# Altium PCB Main.PcbDoc
Units mm, origin at the board's own origin, x right, y up, seen from the top; angles counter-clockwise.
Board outline 64.5 x 68 mm, 4 copper layers (Top Layer, Ground Layer, Power Layer, Bottom Layer), stack 1.591 mm thick; 74 components, 72 nets, 320 pads, 80 vias.
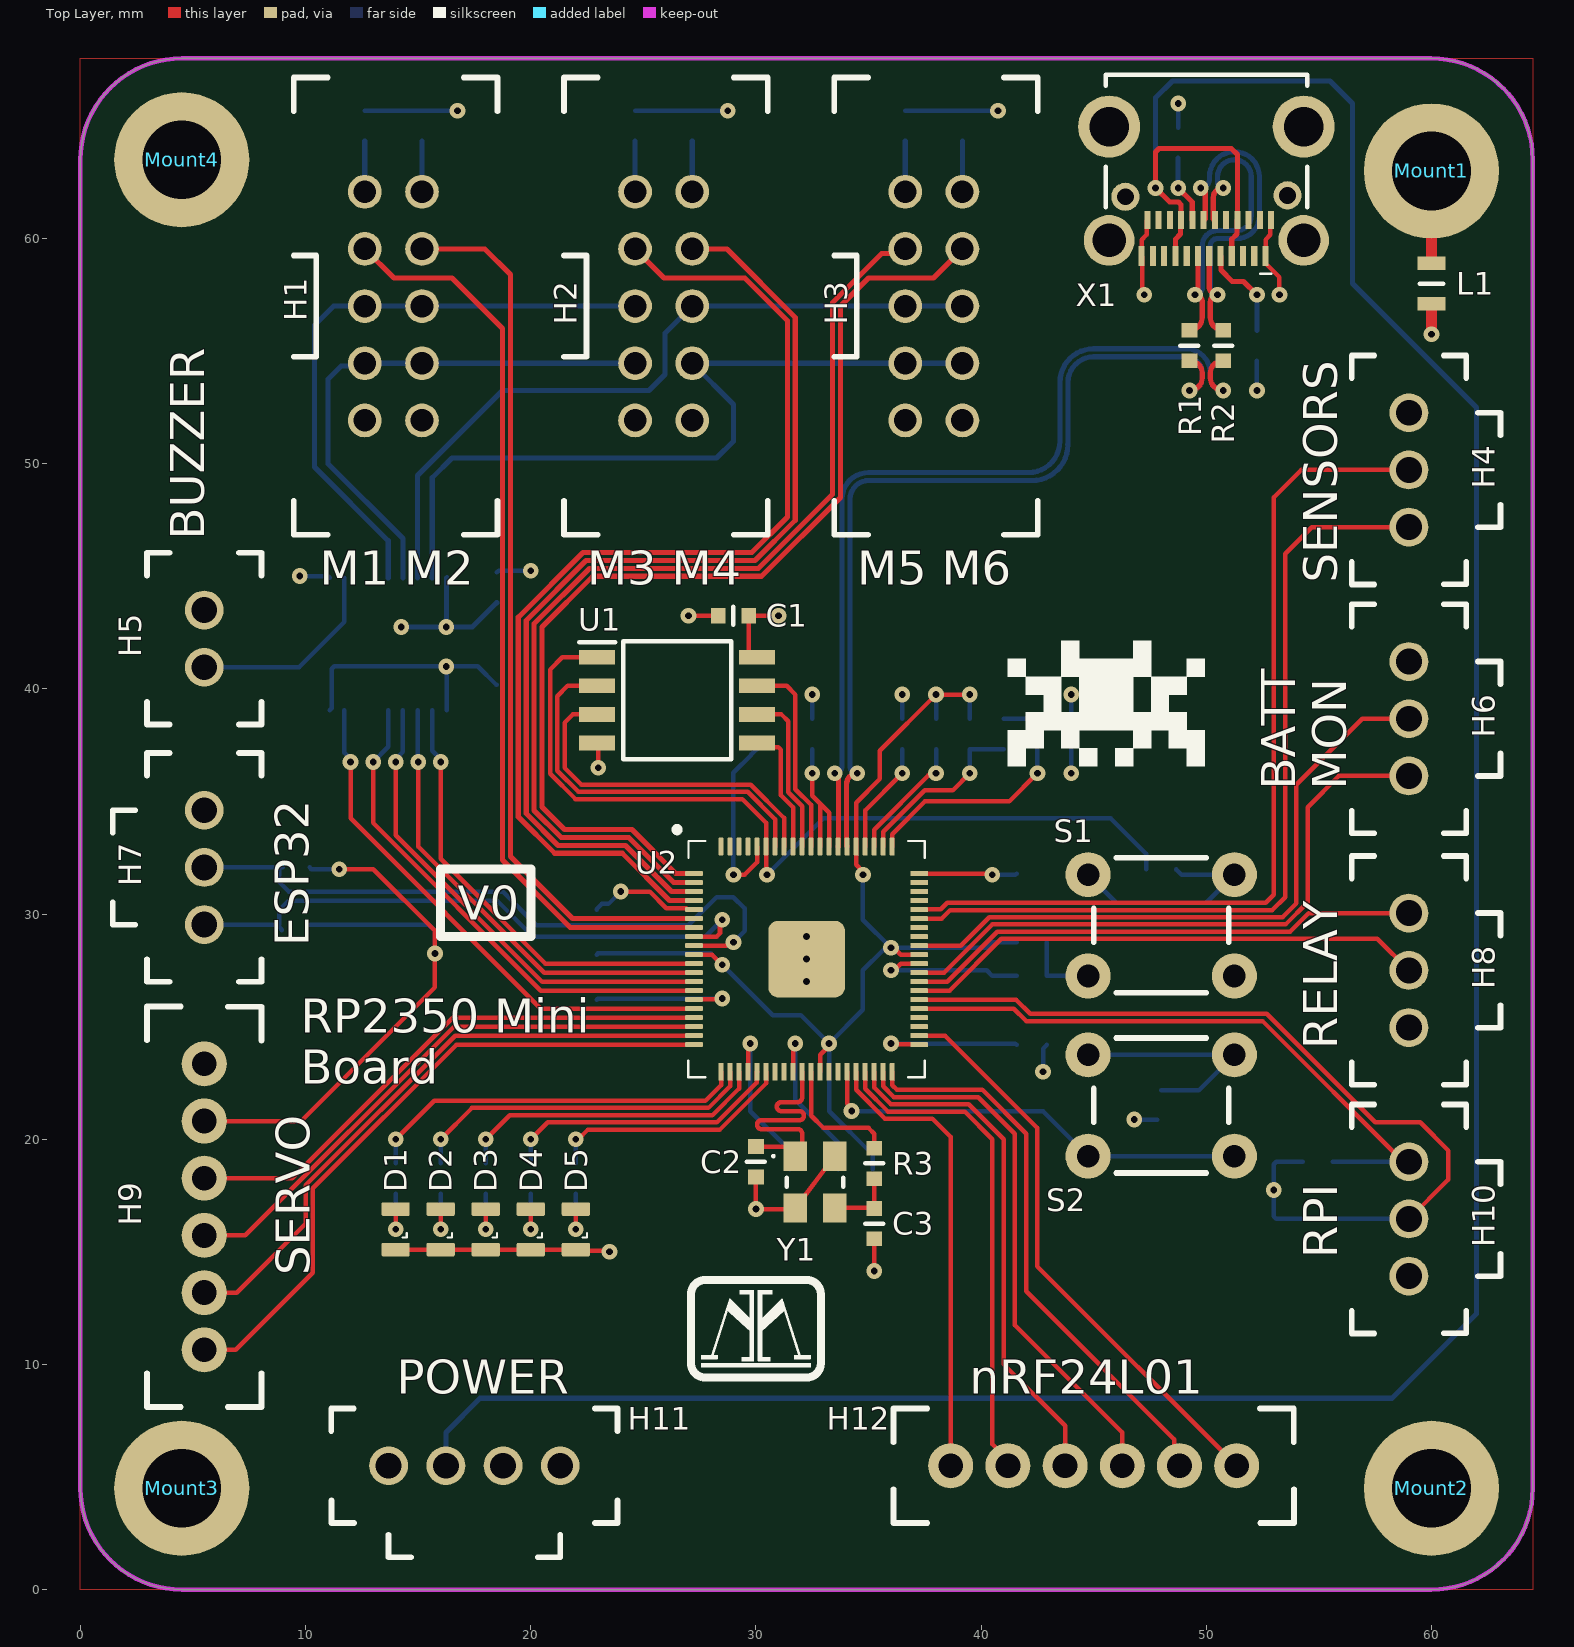
[diagram p0: Top Layer view]
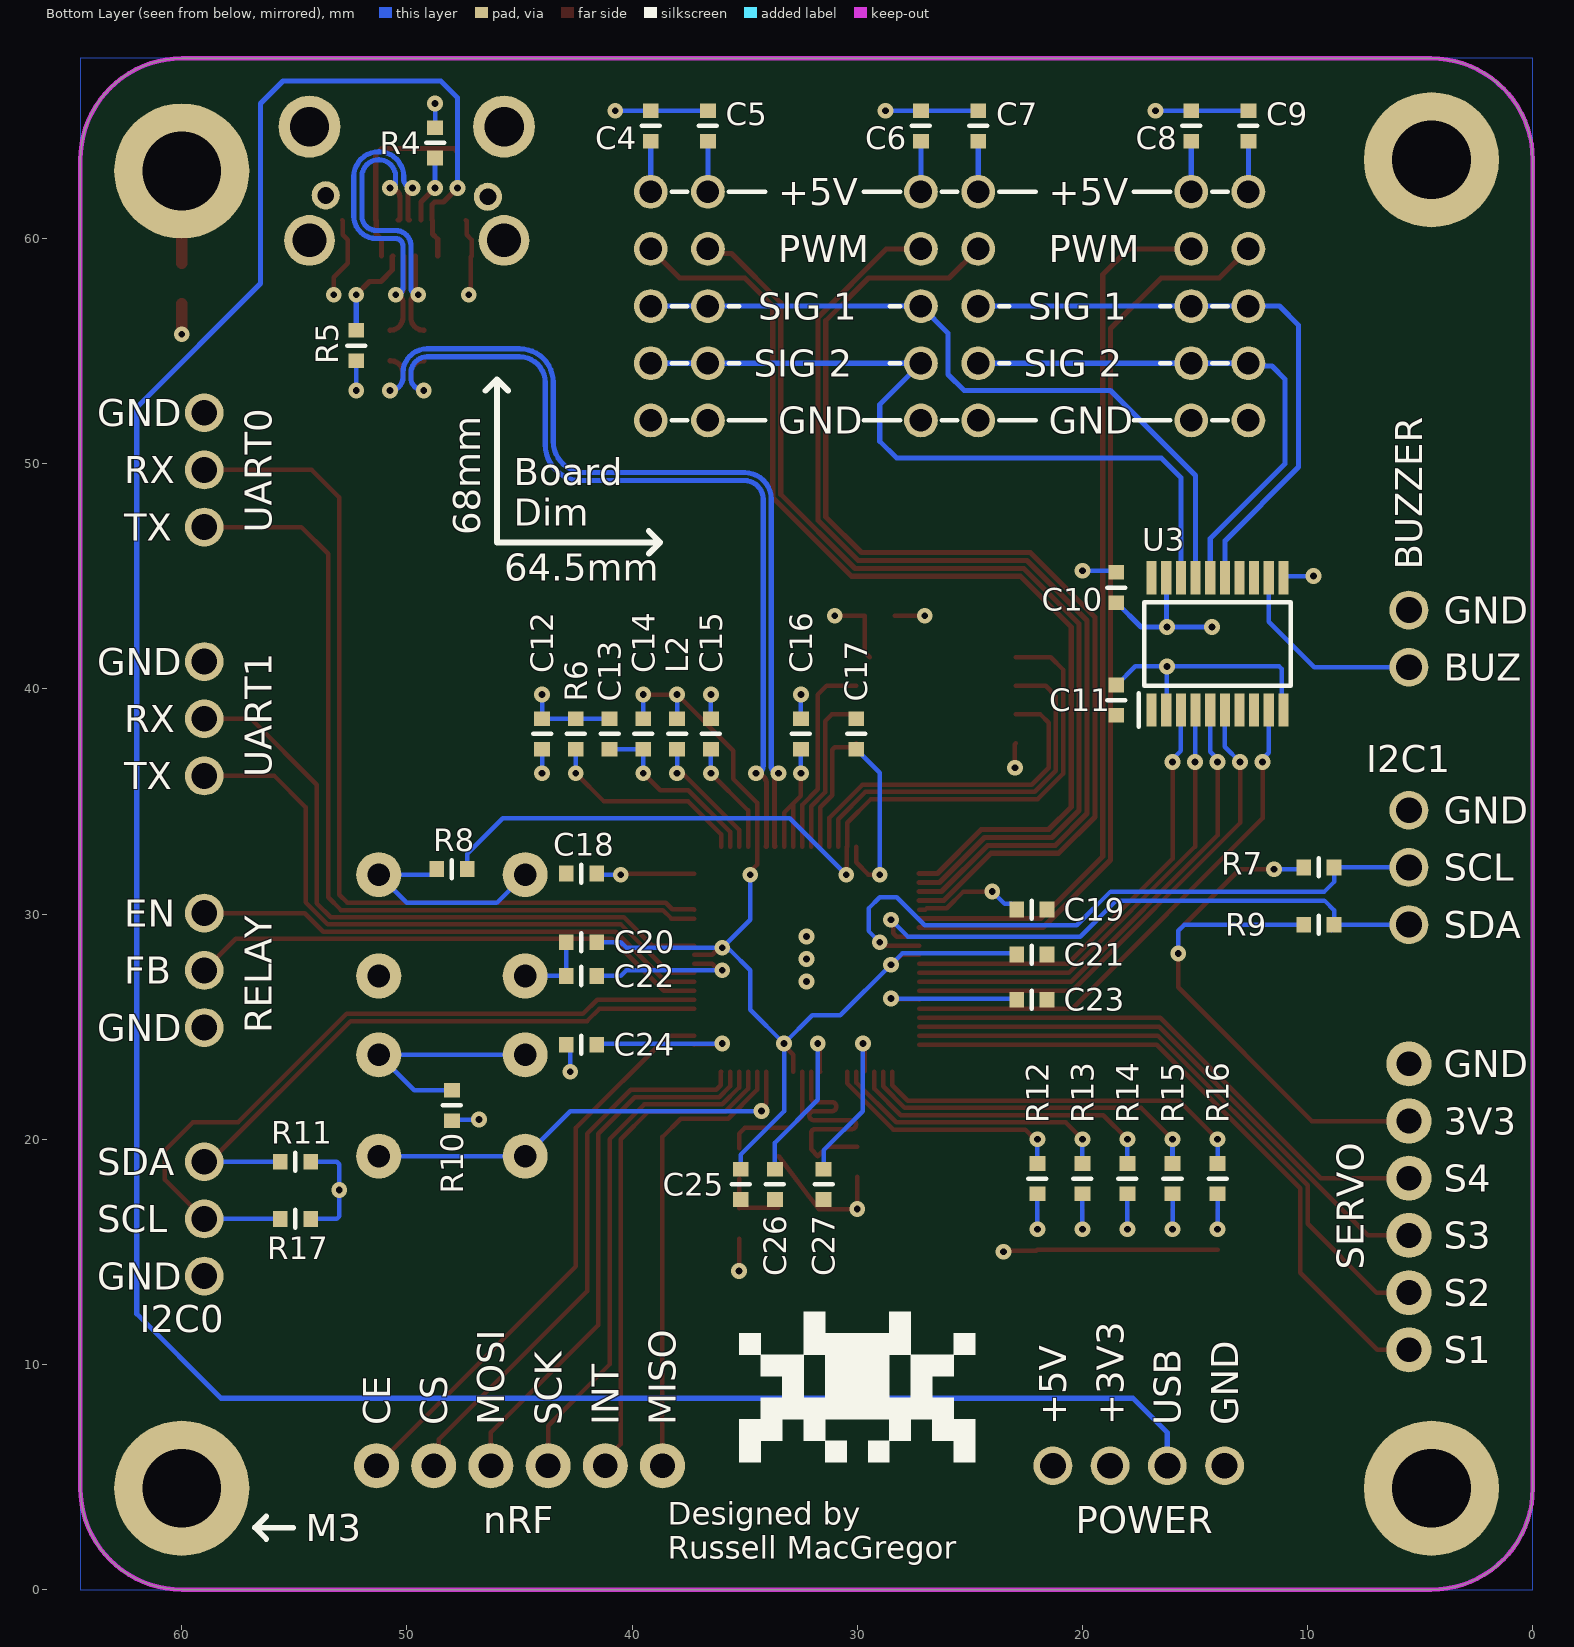
[diagram p1: Bottom Layer view, seen from below]
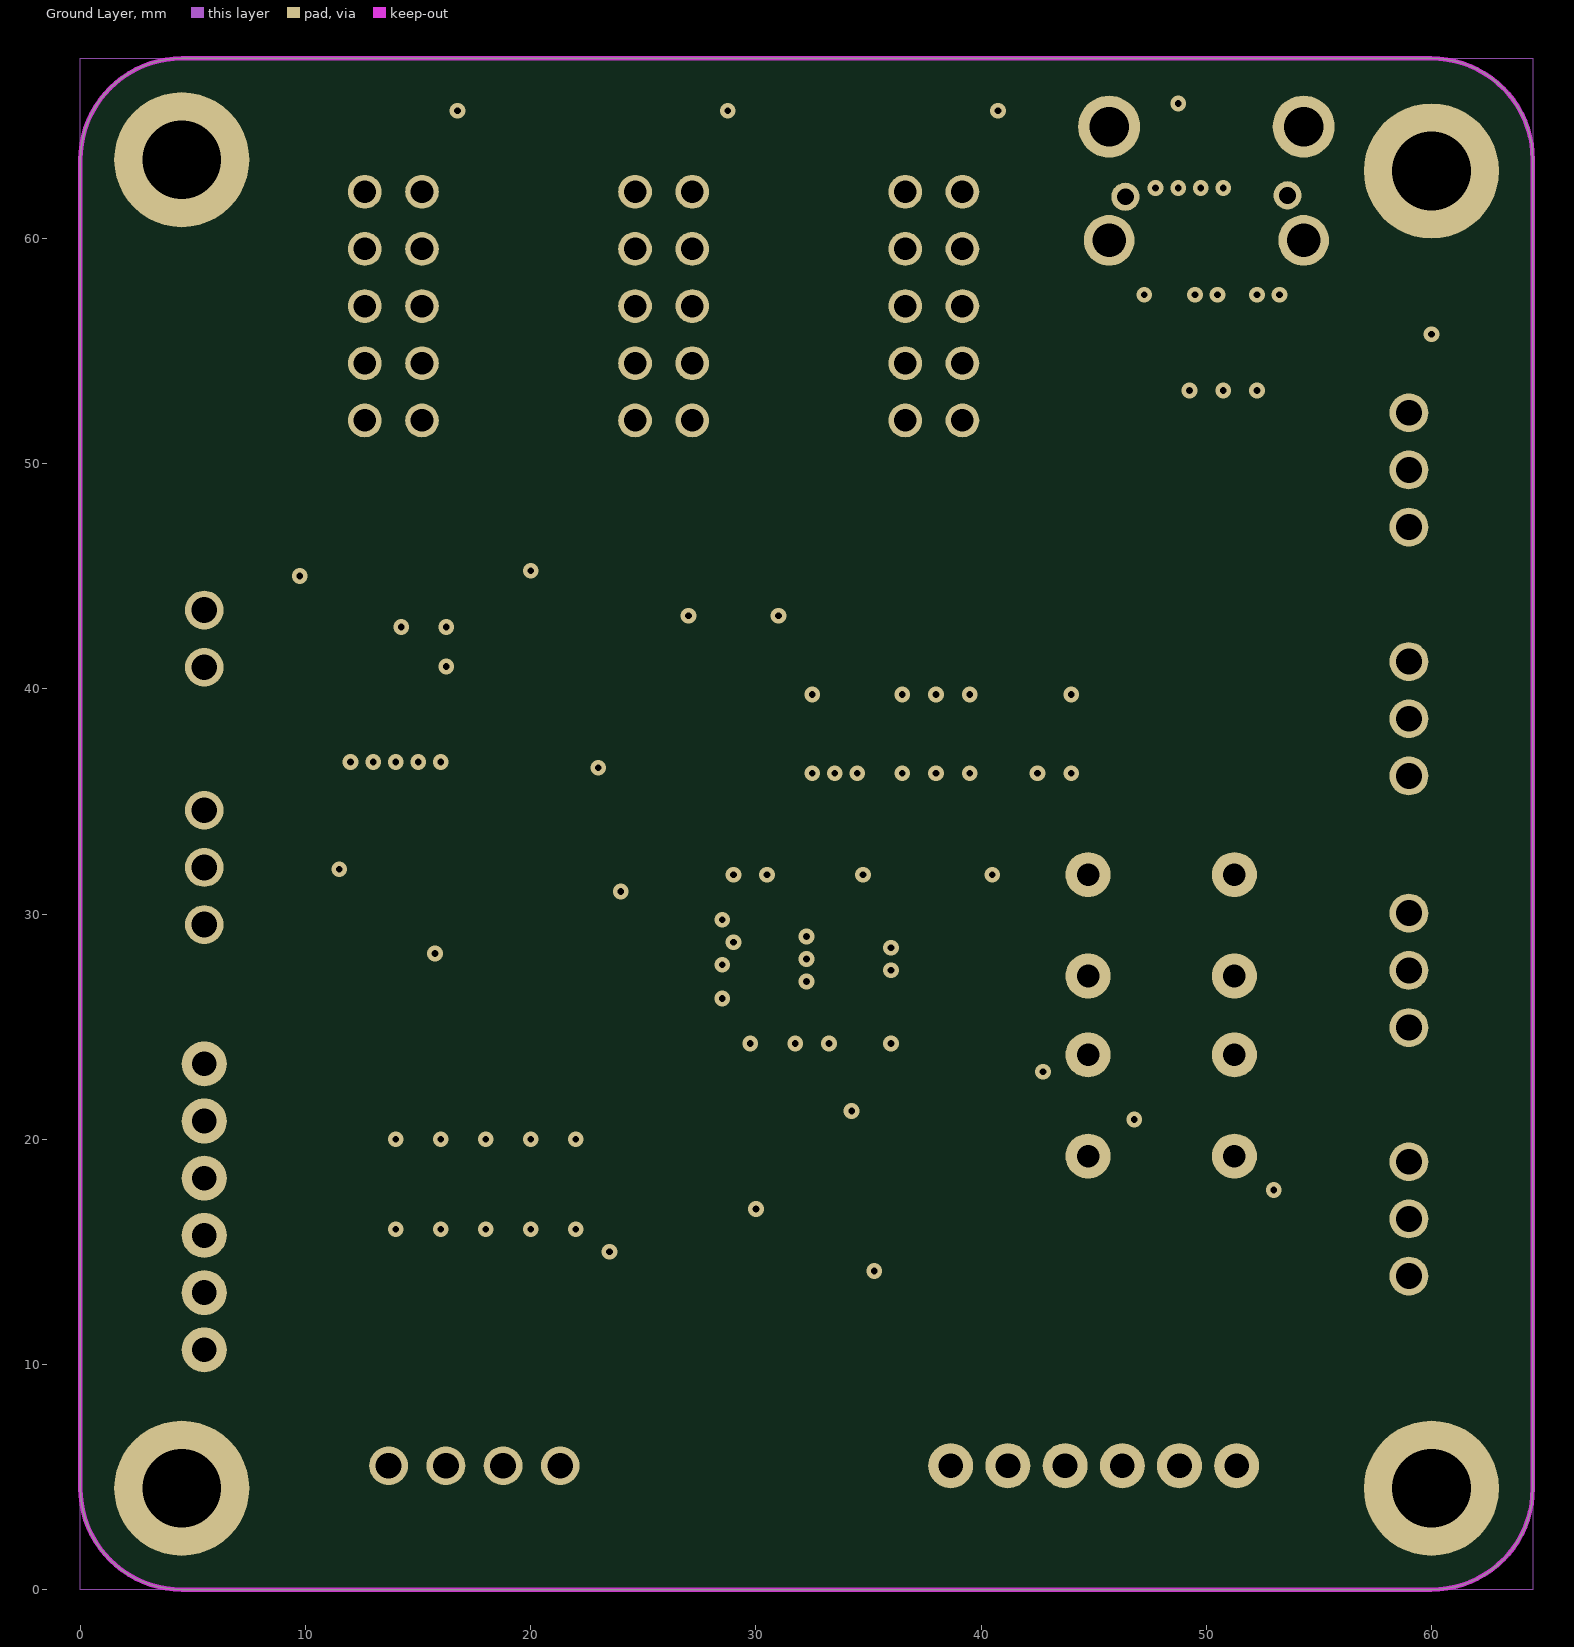
[diagram p2: Ground Layer]
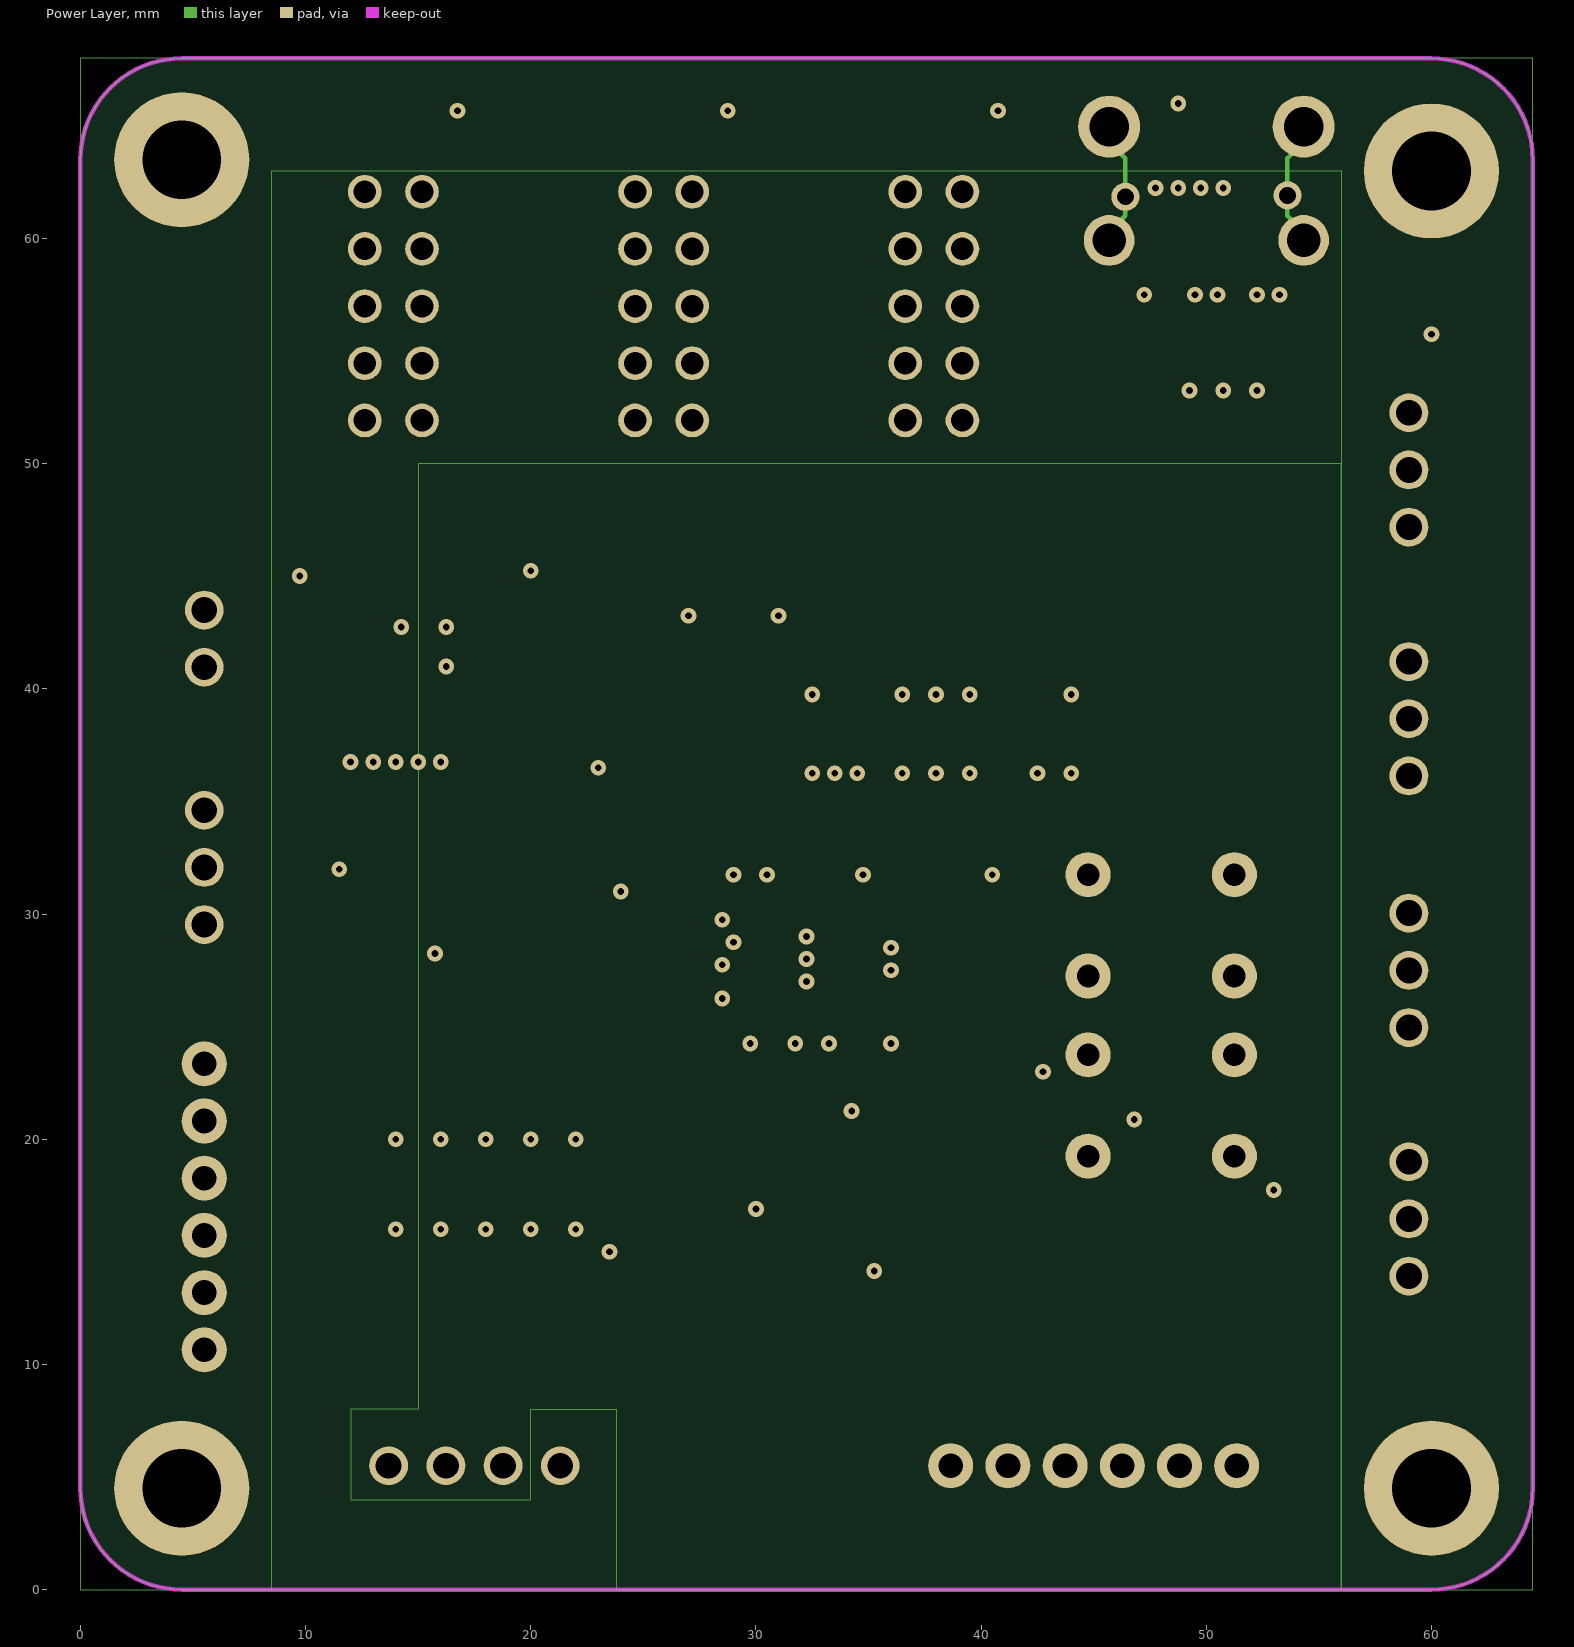
[diagram p3: Power Layer]
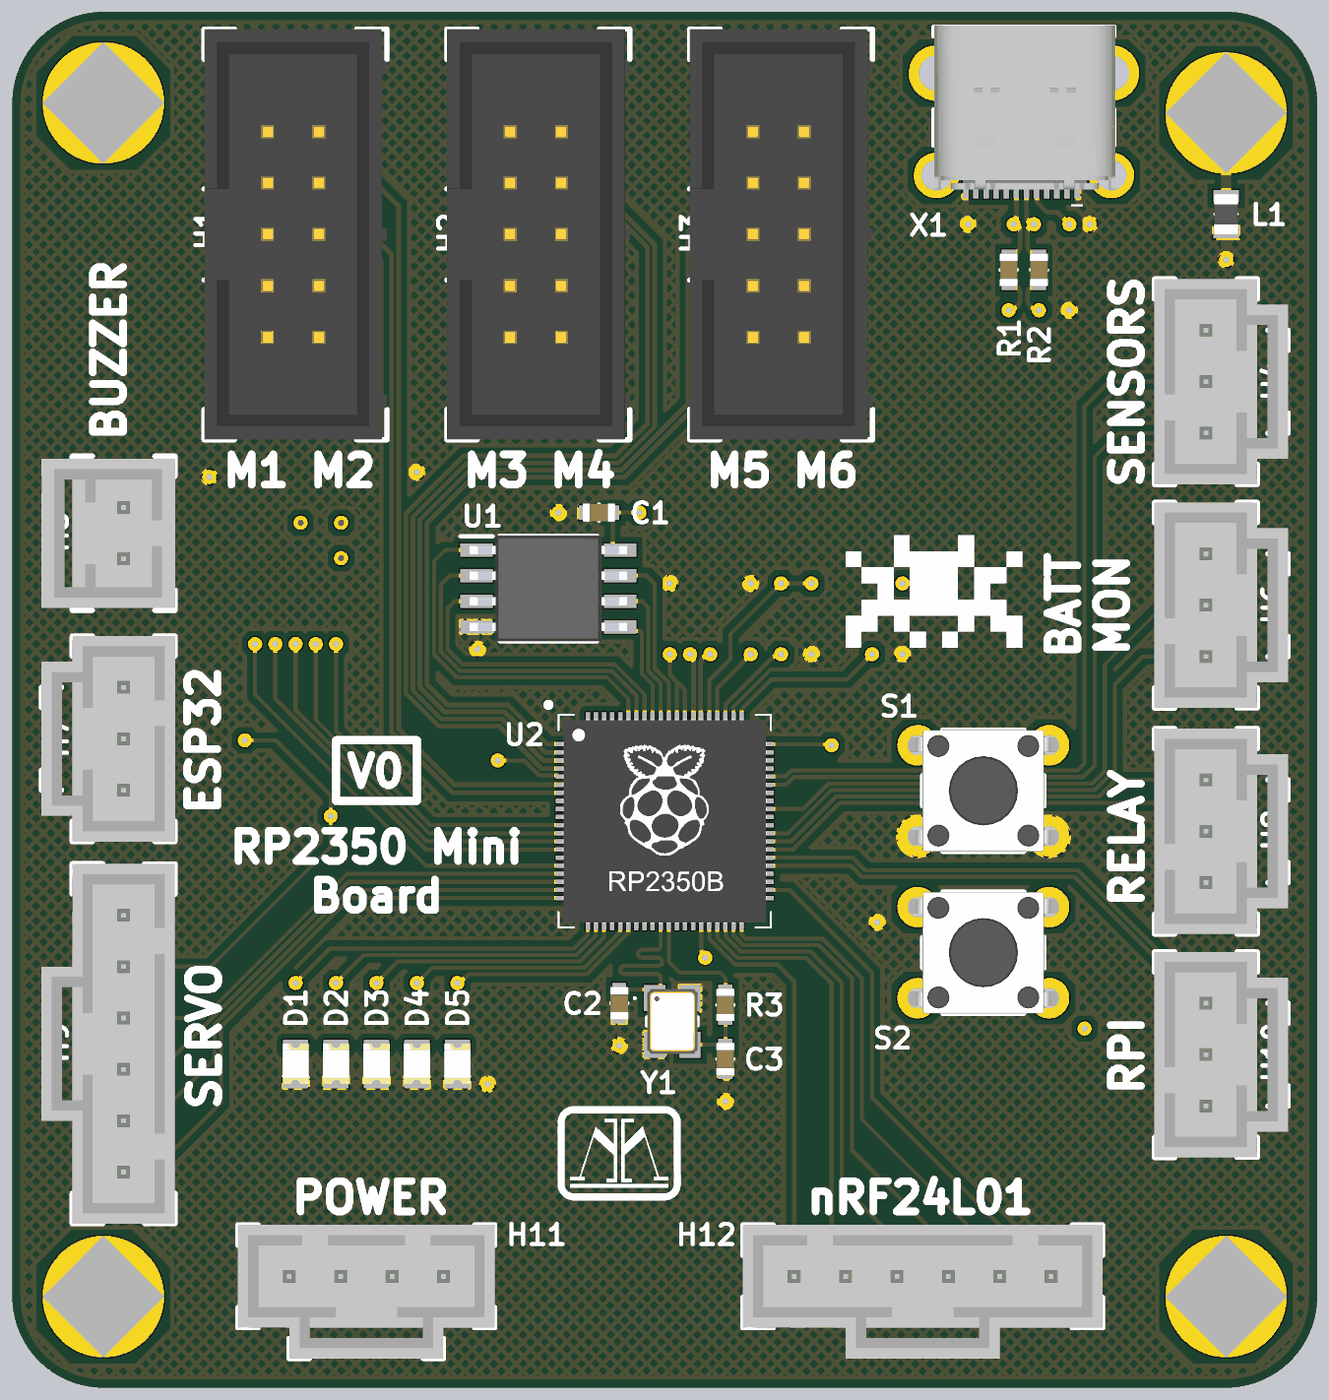
[diagram p4: 3D render of the assembled board from above, using the file's embedded part models]
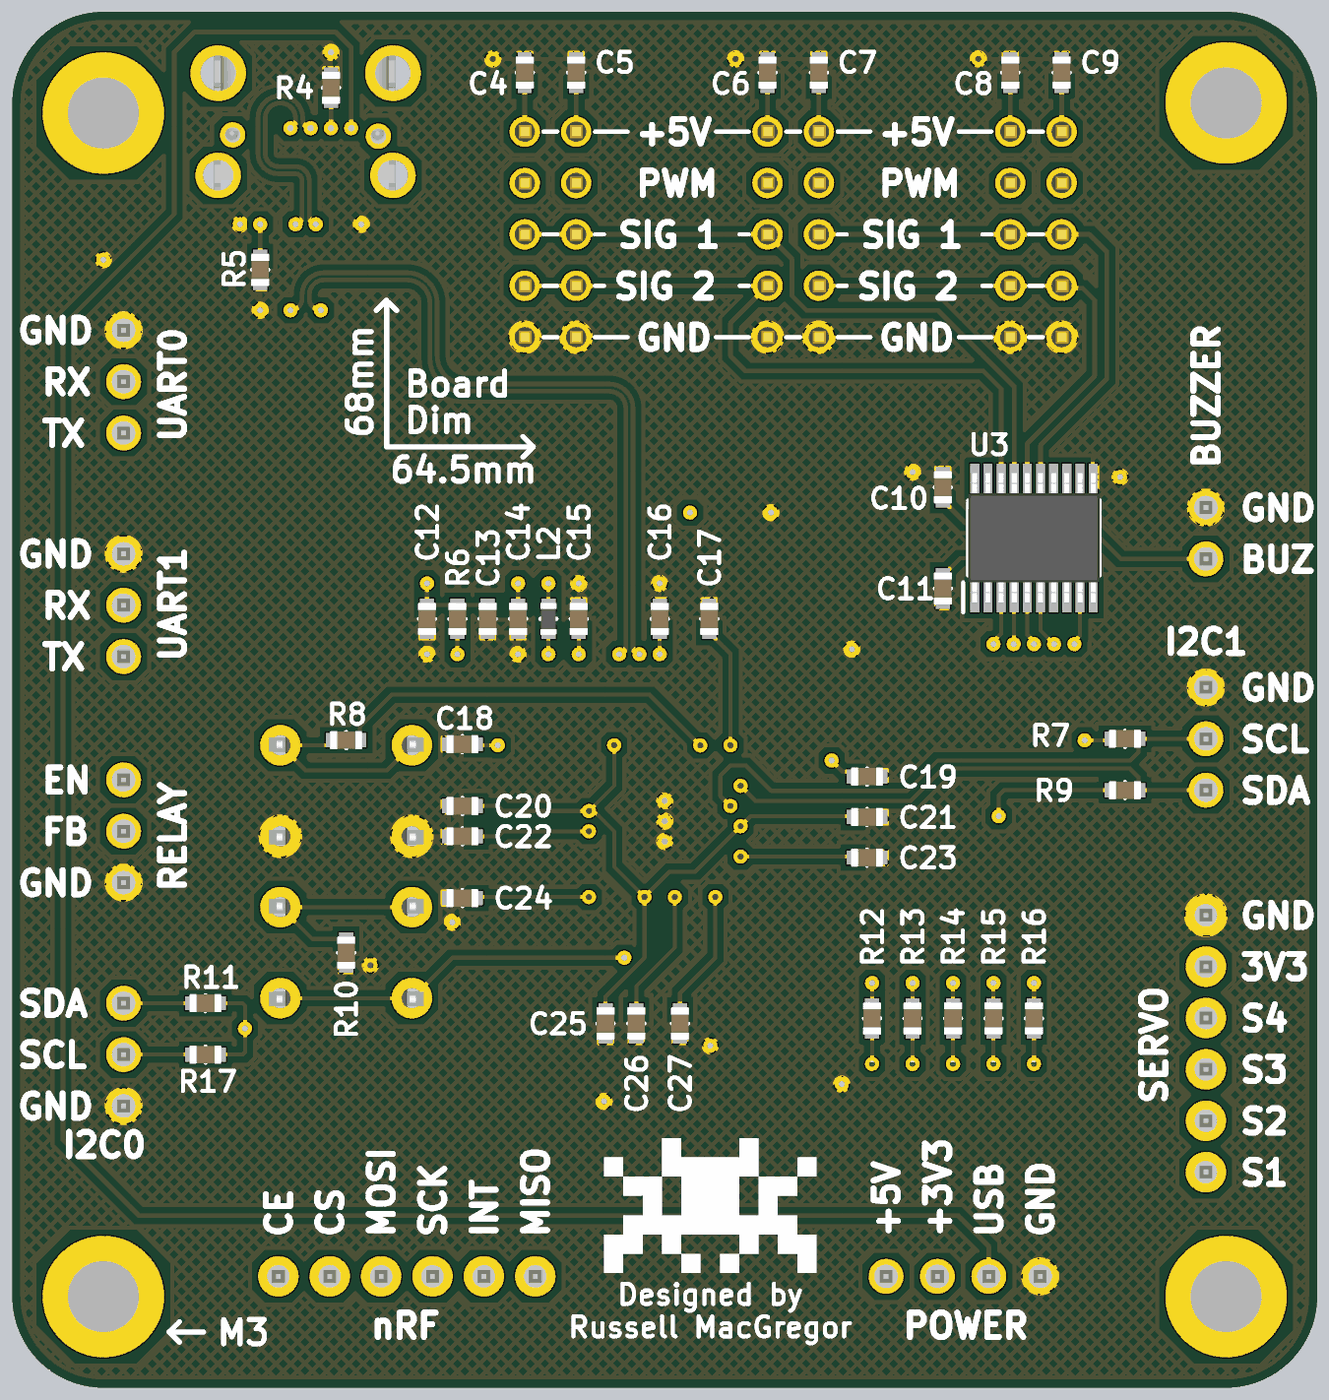
[diagram p5: 3D render of the assembled board from below, using the file's embedded part models]

## Layer stack, top to bottom
Top Solder: solder mask 0.0102, Solder Resist, Dk 3.8
Top Layer: signal copper 0.035
Dielectric 2: prepreg 0.2104, 7628*1, Dk 4.4
Ground Layer: signal copper 0.0175
Dielectric 1: dielectric 1.065, FR-4, Dk 4.8
Power Layer: signal copper 0.0175
Dielectric 3: prepreg 0.2104, 7628*1, Dk 4.4
Bottom Layer: signal copper 0.035
Bottom Solder: solder mask 0.0102, Solder Resist, Dk 3.8

## Board outline
4.5,0 cw(c4.5,4.5) 0,4.5 0,63.5 cw(c4.5,63.5) 4.5,68 60,68 cw(c60,63.5) 64.5,63.5 64.5,4.5 cw(c60,4.5) 60,0

## Design rules (kind name [scope] priority, off if disabled: settings)
BoardOutlineClearance [All] p1: gap=0.2 ignorepadtopadclearanceinfootprint=FALSE
Clearance "inPolygon Clearance" [InPolygon] p1: gap=0.3 ignorepadtopadclearanceinfootprint=TRUE // this rule ensures that every net within a polygon of a different net has a set clearance from the poly
Clearance "Different Diff Pair" [All] p2: gap=0.2 ignorepadtopadclearanceinfootprint=TRUE
Clearance "Same Diff Pair" [All] p3: gap=0.1 ignorepadtopadclearanceinfootprint=TRUE
Clearance "Different Nets" [not InAnyDifferentialPair] p4: gap=0.3 ignorepadtopadclearanceinfootprint=TRUE except(0.1: Arc-SMDPad Arc-THPad Arc-Via Arc-Text Track-SMDPad Track-THPad Track-Via Track-Text SMDPad-Text THPad-Text Via-Text Fill-Text Poly-Text Region-Text Text-Text; 0.12: Arc-Arc Arc-Track Track-Track; 0.15: SMDPad-SMDPad SMDPad-THPad SMDPad-Via THPad-THPad THPad-Via Via-Via; 0.2: Arc-Hole Track-Hole SMDPad-Hole THPad-Hole Via-Hole Fill-Hole Poly-Hole Region-Hole Text-Hole)
Clearance "Same Net" [not InAnyDifferentialPair] p5: gap=0 ignorepadtopadclearanceinfootprint=TRUE except(0.1: THPad-Via; 0.18: Arc-Arc Arc-Track Track-Track)
ComponentClearance [All] p1: gap=0.102 collisioncheckmode=3 verticalgap=0.102 showdistances=TRUE
DiffPairsRouting "Ethernet Routing" [InDifferentialPairClass('Ethernet_Pairs')] p1: maxlimit=0.25 minlimit=0.2 mostfreqgap=0.25 toplayer_maxgap=0.2 toplayer_prefgap=0.2 toplayer_minwidth=0.25 toplayer_maxwidth=0.25 toplayer_prefwidth=0.25 midlayer1_mingap=0.25 midlayer1_minwidth=0.19 midlayer1_maxwidth=0.19 midlayer1_prefwidth=0.19 midlayer2_mingap=0.25 midlayer2_minwidth=0.19 midlayer2_maxwidth=0.19 midlayer2_prefwidth=0.19 bottomlayer_maxgap=0.2 bottomlayer_prefgap=0.2 bottomlayer_minwidth=0.25 bottomlayer_maxwidth=0.25 bottomlayer_prefwidth=0.25 impedanceprofiledriven=TRUE impedanceprofileid={26015F0E-B8D0-437D-86F9-6AF56D0CFF99} impedanceprofilevalue=100.000000 maxuncoupledlength=12.7
DiffPairsRouting "USB Routing" [InDifferentialPairClass('USB_Pairs')] p2: maxlimit=0.291 minlimit=0.127 mostfreqgap=0.291 toplayer_maxgap=0.127 toplayer_prefgap=0.127 toplayer_minwidth=0.23 toplayer_maxwidth=0.23 toplayer_prefwidth=0.23 midlayer1_mingap=0.291 midlayer1_minwidth=0.25 midlayer1_maxwidth=0.25 midlayer1_prefwidth=0.25 midlayer2_mingap=0.291 midlayer2_minwidth=0.25 midlayer2_maxwidth=0.25 midlayer2_prefwidth=0.25 bottomlayer_maxgap=0.127 bottomlayer_prefgap=0.127 bottomlayer_minwidth=0.23 bottomlayer_maxwidth=0.23 bottomlayer_prefwidth=0.23 impedanceprofiledriven=TRUE impedanceprofileid={23704F5B-B61C-45B3-AE5D-6446751AE36F} impedanceprofilevalue=90.000000 maxuncoupledlength=12.7
DiffPairsRouting "CAN Routing" [InDifferentialPairClass('CAN_Pairs')] p3: maxlimit=0.907 minlimit=0.5 mostfreqgap=0.907 toplayer_maxgap=0.5 toplayer_prefgap=0.5 toplayer_minwidth=0.201 toplayer_maxwidth=0.201 toplayer_prefwidth=0.201 midlayer1_mingap=0.907 midlayer1_minwidth=0.155 midlayer1_maxwidth=0.155 midlayer1_prefwidth=0.155 midlayer2_mingap=0.907 midlayer2_minwidth=0.155 midlayer2_maxwidth=0.155 midlayer2_prefwidth=0.155 bottomlayer_maxgap=0.5 bottomlayer_prefgap=0.5 bottomlayer_minwidth=0.201 bottomlayer_maxwidth=0.201 bottomlayer_prefwidth=0.201 impedanceprofiledriven=TRUE impedanceprofileid={9C5641D0-C575-4D61-8D53-8B59EAD66386} impedanceprofilevalue=120.000000 maxuncoupledlength=12.7
Height [All] p1: minheight=0 maxheight=1816.048 prefheight=12.7
HoleSize [All] p1: absolutevalues=TRUE maxlimit=6.3 minlimit=0.3 maxpercent=80.000 minpercent=20.000
HoleToHoleClearance [All] p1: gap=0.25 allowstackedmicrovias=FALSE
Length [All] p1: maxlimit=43.432 minlimit=0 usedelayunits=TRUE mindelay=0.000000 maxdelay=10000.000000
MatchedLengths "Diff Pair Matched Delays" [InDifferentialPairClass('Ethernet_Pairs') or InDifferentialPairClass('USB_Pairs') or InDifferentialPairClass('CAN_Pairs')] p1: tolerance=5 checknetsindiffpair=TRUE checkdiffpairvsdiffpair=FALSE checkxsignals=FALSE checkothers=FALSE usedelayunits=TRUE delaytolerance=100.000000
MinimumAnnularRing [All] p1: minimumring=0.2
MinimumSolderMaskSliver [All] p1: minsoldermaskwidth=0
PlaneClearance "Supply Net Clearance" [InNetClass('Supply_Nets')] p1: clearance=0.5
PlaneClearance "All Nets" [All] p2: clearance=0.3
PolygonConnect "Supply Nets" [InNetClass('Supply_Nets')] p1: connectstyle=Direct reliefconductorwidth=0.3 reliefentries=4 polygonreliefangle="90 Angle" airgapwidth=0.254
PolygonConnect General [All] p2: connectstyle=Relief reliefconductorwidth=0.254 reliefentries=4 polygonreliefangle="90 Angle" airgapwidth=0.254
RoutingVias [All] p1: holewidth=0.2 width=0.35 viastyle="Through Hole" minholewidth=0.15 minwidth=0.3 maxholewidth=6.3 maxwidth=6.55
SilkToSilkClearance [All] p1: silktosilkclearance=0
SilkToSolderMaskClearance [All] p1: minsilkscreentomaskgap=0 clearancetoexposedcopper=TRUE
SolderMaskExpansion [All] p1: expansion=0.075 istentingtop=FALSE
SupplyNets "Schematic Supply Nets_9" [InNet('+5V')] p1: voltage=0.000
SupplyNets "Schematic Supply Nets_6" [InNet('XOUT')] p2: voltage=0.000
SupplyNets "Schematic Supply Nets_4" [InNet('XIN')] p3: voltage=0.000
SupplyNets "Schematic Supply Nets_2" [InNet('RUN')] p4: voltage=0.000
SupplyNets "Schematic Supply Nets_8" [InNet('+1V1')] p5: voltage=0.000
SupplyNets "Schematic Supply Nets_7" [InNet('+3V3')] p6: voltage=0.000
SupplyNets "Schematic Supply Nets_3" [InNet('GND')] p7: voltage=0.000
SupplyNets "Schematic Supply Nets_1" [InNet('Earth')] p8: voltage=0.000
UnRoutedNet [All] p1: checkbadconnections=TRUE
Width [All] p1: maxlimit=100 minlimit=0.1 preferedwidth=0.3
Width "nRF Width" [InNetClass('nRF Signal')] p2: maxlimit=0.379 minlimit=0.263 preferedwidth=0.379 toplayer_minwidth=0.379 midlayer1_maxwidth=0.263 midlayer1_prefwidth=0.263 midlayer2_maxwidth=0.263 midlayer2_prefwidth=0.263 bottomlayer_minwidth=0.379 impedanceprofiledriven=TRUE impedanceprofileid={51D130E4-15AA-4FAE-B850-3F580F8BB047} impedanceprofilevalue=50.000000 minimp=50.000000 maximp=50.000000 favimp=50.000000 checkconnectedcopper=TRUE
20 further rules are at their usual default settings.

## Classes and differential pairs
differential pair class USB_Pairs: RP2350_D RP2350_DX
net class Supply_Nets: +3V3 +5V Earth GND RP2350-USB-5V-VIN
component class "Safety Devices": ` D1 D2 D3 D4 D5 H5 H8 R12 R13 R14 R15 R16
component class RP2350: C1 C2 C3 C12 C13 C14 C15 C16 C17 C18 C19 C20 C21 C22 C23 C24 C25 C26 C27 L1 L2 Mount1 Mount2 Mount3 Mount4 R1 R2 R3 R4 R5 R6 R7 R8 R9 R10 R11 R17 S1 S2 U1 U2 X1 Y1
component class Connections: C4 C5 C6 C7 C8 C9 C10 C11 H1 H2 H3 H4 H6 H7 H9 H10 H11 H12 U3
differential pair RP2350_DX: +RP2350_DX_P -RP2350_DX_N
differential pair RP2350_D: +RP2350_D_P -RP2350_D_N

## Components (designator, comment, footprint, x,y, rotation, side; value= is the part's Value field where it differs from the comment)
C1 "[Cap] SMD Nonpolarized" "[Cap] SMD 0603" 29,43.25 r180 top (schematic designator C19)
C2 "[Cap] SMD Nonpolarized" "[Cap] SMD 0603" 30,19 r90 top (schematic designator C1)
C3 "[Cap] SMD Nonpolarized" "[Cap] SMD 0603" 35.25,16.25 r90 top (schematic designator C2)
C4 "[Cap] SMD Nonpolarized" "[Cap] SMD 0603" 39.17,65 r270 bottom (schematic designator C27)
C5 "[Cap] SMD Nonpolarized" "[Cap] SMD 0603" 36.63,65 r270 bottom (schematic designator C26)
C6 "[Cap] SMD Nonpolarized" "[Cap] SMD 0603" 27.17,65 r270 bottom (schematic designator C25)
C7 "[Cap] SMD Nonpolarized" "[Cap] SMD 0603" 24.63,65 r270 bottom (schematic designator C24)
C8 "[Cap] SMD Nonpolarized" "[Cap] SMD 0603" 15.17,65 r270 bottom (schematic designator C23)
C9 "[Cap] SMD Nonpolarized" "[Cap] SMD 0603" 12.63,65 r270 bottom (schematic designator C22)
C10 "[Cap] SMD Nonpolarized" "[Cap] SMD 0603" 18.5,44.5 r270 bottom (schematic designator C21)
C11 "[Cap] SMD Nonpolarized" "[Cap] SMD 0603" 18.5,39.5 r90 bottom (schematic designator C20)
C12 "[Cap] SMD Nonpolarized" "[Cap] SMD 0603" 44,38 r270 bottom (schematic designator C13)
C13 "[Cap] SMD Nonpolarized" "[Cap] SMD 0603" 41,38 r90 bottom (schematic designator C18)
C14 "[Cap] SMD Nonpolarized" "[Cap] SMD 0603" 39.5,38 r90 bottom (schematic designator C17)
C15 "[Cap] SMD Nonpolarized" "[Cap] SMD 0603" 36.5,38 r270 bottom (schematic designator C10)
C16 "[Cap] SMD Nonpolarized" "[Cap] SMD 0603" 32.5,38 r270 bottom (schematic designator C11)
C17 "[Cap] SMD Nonpolarized" "[Cap] SMD 0603" 30.05,38 r270 bottom (schematic designator C12)
C18 "[Cap] SMD Nonpolarized" "[Cap] SMD 0603" 42.25,31.8 r180 bottom (schematic designator C9)
C19 "[Cap] SMD Nonpolarized" "[Cap] SMD 0603" 22.25,30.2 r0 bottom (schematic designator C3)
C20 "[Cap] SMD Nonpolarized" "[Cap] SMD 0603" 42.25,28.75 r180 bottom (schematic designator C16)
C21 "[Cap] SMD Nonpolarized" "[Cap] SMD 0603" 22.25,28.2 r0 bottom (schematic designator C14)
C22 "[Cap] SMD Nonpolarized" "[Cap] SMD 0603" 42.25,27.25 r180 bottom (schematic designator C8)
C23 "[Cap] SMD Nonpolarized" "[Cap] SMD 0603" 22.25,26.2 r0 bottom (schematic designator C4)
C24 "[Cap] SMD Nonpolarized" "[Cap] SMD 0603" 42.25,24.2 r180 bottom (schematic designator C7)
C25 "[Cap] SMD Nonpolarized" "[Cap] SMD 0603" 35.179,18 r90 bottom (schematic designator C15)
C26 "[Cap] SMD Nonpolarized" "[Cap] SMD 0603" 33.655,18 r90 bottom (schematic designator C6)
C27 "[Cap] SMD Nonpolarized" "[Cap] SMD 0603" 31.496,18 r90 bottom (schematic designator C5)
D1 "SMD LED" "[LED] SMD 0805" 14,16 r270 top
D2 "SMD LED" "[LED] SMD 0805" 16,16 r270 top
D3 "SMD LED" "[LED] SMD 0805" 18,16 r270 top
D4 "SMD LED" "[LED] SMD 0805" 20,16 r270 top
D5 "SMD LED" "[LED] SMD 0805" 22,16 r270 top
H1 "2x5 Shrouded" "[Header] Shrouded 2x5 Male" 14,57 r270 top
H2 "2x5 Shrouded" "[Header] Shrouded 2x5 Male" 26,57 r270 top (schematic designator H3)
H3 "2x5 Shrouded" "[Header] Shrouded 2x5 Male" 38,57 r270 top (schematic designator H5)
H4 "1x3 Male" "[Header] Shrouded 1x3 Male" 59,49.723 r270 top (schematic designator H7)
H5 "1x2 Male" "[Header] Shrouded 1x2 Male" 5.5,42.23 r90 top (schematic designator H12)
H6 "1x3 Male" "[Header] Shrouded 1x3 Male" 59,38.674 r270 top
H7 "1x3 Male" "[Header] Shrouded 1x3 Male" 5.5,32.07 r90 top (schematic designator H10)
H8 "1x3 Male" "[Header] Shrouded 1x3 Male" 59,27.5 r270 top (schematic designator H11)
H9 "[Header] Shrouded 1x6 Male" "[Header] Shrouded 1x6 Male" 5.5,17 r90 top (schematic designator H2)
H10 "1x3 Male" "[Header] Shrouded 1x3 Male" 59,16.46 r270 top (schematic designator H8)
H11 "1x4 Male" "[Header] Shrouded 1x4 Male" 17.5,5.5 r180 top (schematic designator H4)
H12 "[Header] Shrouded 1x6 Male" "[Header] Shrouded 1x6 Male" 45,5.5 r180 top (schematic designator H9)
L1 "652-MH2029-300Y" "[Ferrite] SMD Bead 0805 (1)" 60,58 r270 top
L2 "SMD Inductor" "[Inductor] SMD 0603" 38,38 r270 bottom
Mount1 "M3 Mount Hole" "[Mount] M3 Mount Hole" 60,63 r90 top (schematic designator Mount2)
Mount2 "M3 Mount Hole" "[Mount] M3 Mount Hole" 60,4.5 r0 top
Mount3 "M3 Mount Hole" "[Mount] M3 Mount Hole" 4.5,4.5 r90 top
Mount4 "M3 Mount Hole" "[Mount] M3 Mount Hole" 4.5,63.5 r0 top
R1 "[Res] SMD Resistor" "[Res] SMD 0603" 49.25,55.25 r270 top (schematic designator R8)
R2 "[Res] SMD Resistor" "[Res] SMD 0603" 50.75,55.25 r270 top (schematic designator R7)
R3 "[Res] SMD Resistor" "[Res] SMD 0603" 35.25,18.925 r270 top (schematic designator R1)
R4 "[Res] SMD Resistor" "[Res] SMD 0603" 48.75,64.25 r90 bottom (schematic designator R10)
R5 "[Res] SMD Resistor" "[Res] SMD 0603" 52.25,55.25 r90 bottom (schematic designator R9)
R6 "[Res] SMD Resistor" "[Res] SMD 0603" 42.5,38 r90 bottom (schematic designator R11)
R7 "[Res] SMD Resistor" "[Res] SMD 0603" 9.5,32.07 r0 bottom (schematic designator R6)
R8 "[Res] SMD Resistor" "[Res] SMD 0603" 48,32 r180 bottom (schematic designator R12)
R9 "[Res] SMD Resistor" "[Res] SMD 0603" 9.5,29.53 r0 bottom (schematic designator R5)
R10 "[Res] SMD Resistor" "[Res] SMD 0603" 48,21.5 r270 bottom (schematic designator R2)
R11 "[Res] SMD Resistor" "[Res] SMD 0603" 54.951,19 r180 bottom (schematic designator R3)
R12 "[Res] SMD Resistor" "[Res] SMD 0603" 22,18.25 r90 bottom (schematic designator R17)
R13 "[Res] SMD Resistor" "[Res] SMD 0603" 20,18.25 r90 bottom (schematic designator R16)
R14 "[Res] SMD Resistor" "[Res] SMD 0603" 18,18.25 r90 bottom (schematic designator R15)
R15 "[Res] SMD Resistor" "[Res] SMD 0603" 16,18.25 r90 bottom (schematic designator R14)
R16 "[Res] SMD Resistor" "[Res] SMD 0603" 14,18.25 r90 bottom (schematic designator R13)
R17 "[Res] SMD Resistor" "[Res] SMD 0603" 54.951,16.46 r180 bottom (schematic designator R4)
S1 "Standard pushbutton" "[Switch] Pushbutton" 48,29.5 r0 top (schematic designator S2)
S2 "Standard pushbutton" "[Switch] Pushbutton" 48,21.5 r180 top (schematic designator S1)
U1 "W25Q128JVS" "[Mem] 16Mb Flash Memory" 26.5,39.5 r0 top (schematic designator U2)
U2 "RP2350B" "[MCU] RP2350B" 32.25,28 r0 top (schematic designator U1)
U3 "[IC] Level Shifter (2)" "[IC] Level Shifter (2)" 14,42 r90 bottom
X1 "USB-C" "[Port] USB-C" 50.006,63.185 r180 top
Y1 "12MHz" "[XTAL] SMD 12MHz" 32.625,18.1 r270 top

## Footprints (in the part's own frame and the unit in brackets; to place one, negate y for a bottom-side part, rotate by r counter-clockwise, add the part's x,y. Pads: shape width x height; smd on the part's side, far side on the other; paste and mask are expansions set on the pad)
"[Cap] SMD 0603" [mm]
  rect 0.65x0.7 smd: 1(-0.675,0) 2(0.675,0)
  silkscreen extent 0,-0.4 0,0.4, body extent -0.8,-0.45 0.8,0.45, height 0.8
"[Ferrite] SMD Bead 0805 (1)" [mm]
  rect 0.6x1.25 smd: 1(-0.9,0) 2(0.9,0)
  silkscreen extent 0,-0.53 0,0.53, body extent -1,-0.6 1,0.6, height 1.1
"[Header] Shrouded 1x2 Male" [mm]
  round 1.725 hole 1.15: 1(-1.27,0) 2(1.27,0)
  silkscreen extent -3.81,-2.54 3.81,2.54, body extent -3.68,-2.54 3.68,4.06, height 11.71
"[Header] Shrouded 1x3 Male" [mm] "070543-0037 / Mates with 005057-9403"
  round 1.725 hole 1.15: 1(-2.54,0) 2(0,0) 3(2.54,0)
  silkscreen extent -5.08,-2.54 5.09,4.06, body extent -5.08,-2.54 5.08,4.06, height 11.67
"[Header] Shrouded 1x4 Male" [mm] "70543-0003 / Mates with 0050579404"
  round 1.725 hole 1.15: 1(-3.81,0) 2(-1.27,0) 3(1.27,0) 4(3.81,0)
  silkscreen extent -6.35,-2.54 6.36,4.06, body extent -6.35,-2.54 6.35,4.06, height 11.64
"[Header] Shrouded 1x6 Male" [mm]
  round 2 hole 1.1: 1(-6.35,0) 2(-3.81,0) 3(-1.27,0) 4(1.27,0) 5(3.81,0) 6(6.35,0)
  silkscreen extent -8.9,-2.54 8.9,2.54, body extent -8.89,-2.54 8.89,4.06, height 11.49
"[Header] Shrouded 2x5 Male" [mm]
  round 1.5 hole 1: 1(-5.08,-1.37) 2(-5.08,1.17) 3(-2.54,-1.37) 4(-2.54,1.17) 5(0,-1.37) 6(0,1.17) 7(2.54,-1.37) 8(2.54,1.17) 9(5.08,-1.37) 10(5.08,1.17)
  silkscreen extent -10.15,-4.52 10.15,4.52, body extent -10.15,-4.52 10.15,4.52, height 8.8
"[IC] Level Shifter (2)" [mm]
  rect 1.475x0.45 smd: 1(-2.938,2.925) 2(-2.938,2.275) 3(-2.938,1.625) 4(-2.938,0.975) 5(-2.938,0.325) 6(-2.938,-0.325) 7(-2.938,-0.975) 8(-2.938,-1.625) 9(-2.938,-2.275) 10(-2.938,-2.925) 11(2.938,-2.925) 12(2.938,-2.275) 13(2.938,-1.625) 14(2.938,-0.975) 15(2.938,-0.325) 16(2.938,0.325) 17(2.938,0.975) 18(2.938,1.625) 19(2.938,2.275) 20(2.938,2.925)
  silkscreen extent -3.67,-3.25 1.85,3.5, body extent -3.2,-3.25 3.2,3.25, height 1.13
"[Inductor] SMD 0603" [mm]
  rect 0.65x0.7 smd: 1(-0.675,0) 2(0.675,0)
  silkscreen extent 0,-0.4 0,0.4, body extent -0.8,-0.4 0.8,0.4, height 0.95
"[LED] SMD 0805" [mm]
  rrect20% 0.6x1.25 smd: 1(-0.9,0) 2(0.9,0)
  silkscreen extent 0.17,0.3 0.37,0.5, body extent -1,-0.65 1,0.65, height 0.8
"[MCU] RP2350B" [mm]
  rrect25% 0.78x0.22 smd: 1(-5,3.8) 2(-5,3.4) 3(-5,3) 4(-5,2.6) 5(-5,2.2) 6(-5,1.8) 7(-5,1.4) 8(-5,1) 9(-5,0.6) 10(-5,0.2) 11(-5,-0.2) 12(-5,-0.6) 13(-5,-1) 14(-5,-1.4) 15(-5,-1.8) 16(-5,-2.2) 17(-5,-2.6) 18(-5,-3) 19(-5,-3.4) 20(-5,-3.8) 41(5,-3.8) 42(5,-3.4) 43(5,-3) 44(5,-2.6) 45(5,-2.2) 46(5,-1.8) 47(5,-1.4) 48(5,-1) 49(5,-0.6) 50(5,-0.2) 51(5,0.2) 52(5,0.6) 53(5,1) 54(5,1.4) 55(5,1.8) 56(5,2.2) 57(5,2.6) 58(5,3) 59(5,3.4) 60(5,3.8)
  rrect25% 0.22x0.78 smd: 21(-3.8,-5) 22(-3.4,-5) 23(-3,-5) 24(-2.6,-5) 25(-2.2,-5) 26(-1.8,-5) 27(-1.4,-5) 28(-1,-5) 29(-0.6,-5) 30(-0.2,-5) 31(0.2,-5) 32(0.6,-5) 33(1,-5) 34(1.4,-5) 35(1.8,-5) 36(2.2,-5) 37(2.6,-5) 38(3,-5) 39(3.4,-5) 40(3.8,-5) 61(3.8,5) 62(3.4,5) 63(3,5) 64(2.6,5) 65(2.2,5) 66(1.8,5) 67(1.4,5) 68(1,5) 69(0.6,5) 70(0.2,5) 71(-0.2,5) 72(-0.6,5) 73(-1,5) 74(-1.4,5) 75(-1.8,5) 76(-2.2,5) 77(-2.6,5) 78(-3,5) 79(-3.4,5) 80(-3.8,5)
  rrect25% 3.4x3.4 smd: Pad(0,0)
  silkscreen extent -5.85,-5.25 5.25,5.85, body extent -5.05,-5.05 5.05,5.05, height 0.96
"[Mem] 16Mb Flash Memory" [mm] "W25Q128JVSIQ TR"
  rect 1.6x0.65 smd: 1(-3.55,1.905) 2(-3.55,0.635) 3(-3.55,-0.635) 4(-3.55,-1.905) 5(3.55,-1.905) 6(3.55,-0.635) 7(3.55,0.635) 8(3.55,1.905)
  silkscreen extent -4.35,-2.61 2.4,2.62, body extent -3.9,-2.61 3.9,2.62, height 1.95
"[Mount] M3 Mount Hole" [mm] "Place at least 4.5mm from board edge. Plated."
  round 6 hole 3.5: 1(0,0)
"[Port] USB-C" [mm]
  rect 0.27x0.9 smd: A1(-2.625,3.965) A2(-2.125,3.965) A3(-1.625,3.965) A4(-1.125,3.965) A5(-0.625,3.965) A6(-0.125,3.965) A7(0.375,3.965) A8(0.875,3.965) A9(1.375,3.965) A10(1.875,3.965) A11(2.375,3.965) A12(2.875,3.965)
  rect 0.27x0.8 smd: B1(2.625,2.365) B2(2.125,2.365) B3(1.625,2.365) B4(1.125,2.365) B5(0.625,2.365) B6(0.125,2.365) B7(-0.375,2.365) B8(-0.875,2.365) B9(-1.375,2.365) B10(-1.875,2.365) B11(-2.375,2.365) B12(-2.875,2.365)
  round 2.25 hole 1.5: MH(-4.32,3.265) MH(4.32,3.265)
  round 2.75 hole 1.75: MH(-4.32,-1.785) MH(4.32,-1.785)
  round 1.25 hole 0.75: MH(-3.6,1.265) MH(3.6,1.33)
  silkscreen extent -4.47,-4.09 4.47,4.75, body extent -4.51,-4.16 4.43,4.01, height 2.92
"[Res] SMD 0603" [mm]
  rect 0.65x0.7 smd: 1(-0.675,0) 2(0.675,0)
  silkscreen extent 0,-0.4 0,0.4, body extent -0.8,-0.45 0.8,0.45, height 0.8
"[Switch] Pushbutton" [mm] "(Regular pushbutton)"
  round 2 hole 1: 1(-3.25,2.25) 1(3.25,2.25) 2(-3.25,-2.25) 2(3.25,-2.25)
  silkscreen extent -3,-3 3,3, body extent -3.85,-3 3.85,3, height 4.95
"[XTAL] SMD 12MHz" [mm]
  rect 1.3x1.05 smd: 1(-1.15,-0.875) 2(1.15,-0.875) 3(1.15,0.875) 4(-1.15,0.875)
  silkscreen extent -1.2,-1.9 0.2,1.25, body extent -1.6,-1.25 1.6,1.25, height 0.75

## Part data
C1 C4 C5 C6 C7 C8 C9 C10 C11 C15 C16 C17 C18 C19 C21 C22 C23 C24 C25 C26 C27: Capacitance=100nF, Size Package=0603, Supplier Part Number 1=311-1088-6-ND, Tolerance=5%, Voltage=6.3V, Supplier 1=DigiKey
C2 C3: Capacitance=15pF, Size Package=0603, Supplier Part Number 1=490-16416-1-ND, Tolerance=1%, Voltage=6.3V, Supplier 1=DigiKey
C12 C13 C14 C20: Capacitance=4.7uF, Size Package=0603, Supplier Part Number 1=490-7203-1-ND, Tolerance=10%, Voltage=6.3V, Supplier 1=DigiKey
D1: library part "[LED] SMD", "Generic", Color=Green, Size Package=0805, Supplier Part Number 1=475-LGR971-KN-1CT-ND, Supplier 1=DigiKey
D2: library part "[LED] SMD", "Generic", Color=Yellow, Size Package=0805, Supplier Part Number 1=475-LYR976-PS-36-0-20-R18CT-ND, Supplier 1=DigiKey
D3: library part "[LED] SMD", "Generic", Color=Red, Size Package=0805, Supplier Part Number 1=475-LSR976-NR-1CT-ND, Supplier 1=DigiKey
D4 D5: library part "[LED] SMD", "Generic", Color=Blue, Size Package=0805, Supplier Part Number 1=732-4982-1-ND, Supplier 1=DigiKey
H1 H2 H3: library part "[Header] Shrouded 2x5 Male", "BHR-10-VUA", Supplier Part Number 1=2057-BHR-10-VUA-ND, Supplier 1=DigiKey
H4 H6 H7 H8 H10: library part "[Header] Shrouded 1x3 Male", "070543-0037 / Mates with 005057-9403", Supplier Part Number 1=WM4825-ND, Supplier 1=DigiKey
  H4 H7 H8 H10: Supplier 2=DigiKey, Supplier Part Number 2=WM2901-ND
H5: library part "[Header] Shrouded 1x2 Male", "0705430036 / Mates with 0050579402", Supplier Part Number 1=WM4824-ND, Supplier 1=DigiKey, Supplier 2=DigiKey, Supplier Part Number 2=WM2900-ND
H9 H12: "0705430005 / Mates with 0050579406", Supplier Part Number 1=WM4804-ND, Supplier 1=DigiKey, Supplier 2=DigiKey, Supplier Part Number 2=WM2904-ND
H11: library part "[Header] Shrouded 1x4 Male", "70543-0003 / Mates with 005057-9404", Supplier Part Number 1=0705430003, Supplier 1=Avnet
L1: library part "[Ferrite] SMD Ferrite Bead (1)", Res @ Freq="30 @ 100MHz", Size Package=0805, Supplier Part Number 1=MH2029-300YCT-ND, Supplier 1=DigiKey
L2: library part "[Inductor] SMD Inductor", Inductance=10uH, Size Package=0603, Supplier Part Number 1=553-BSCY00160808100MCPCT-ND, Supplier 1=DigiKey
Mount1 Mount2 Mount3 Mount4: library part "[Mount] M3 Mount Hole", "Place at least 4.5mm from board edge. Plated."
R1 R2: "Generic", Resistance=27, Size Package=0603, Supplier Part Number 1=749-1631-1-ND, Tolerance=1%, Supplier 1=DigiKey
R3 R8 R10 R12 R13 R14 R15 R16: "Generic", Resistance=1k, Size Package=0603, Supplier Part Number 1=RMCF0603FT1K00DKR-ND, Tolerance=5%, Supplier 1=DigiKey
R4 R5: "Generic", Resistance=5.1k, Size Package=0603, Supplier Part Number 1=311-5.10KHRDKR-ND, Tolerance=1%, Supplier 1=DigiKey
R6: "Generic", Resistance=33, Size Package=0603, Supplier Part Number 1=RR08Q33DCT-ND, Tolerance=1%, Supplier 1=DigiKey
R7 R9 R11 R17: "Generic", Resistance=2k, Size Package=0603, Supplier Part Number 1=P2.0KBDCT-ND, Tolerance=5%, Supplier 1=DigiKey
S1 S2: library part "[Switch] Pushbutton", Supplier Part Number 1=450-1650-ND, Supplier 1=DigiKey
U1: library part "[Mem] 16Mb Flash Memory", "W25Q128JVSIQ TR", Supplier Part Number 1=256-W25Q128JVSIQTRCT-ND, Supplier 1=DigiKey
U2: library part "[MCU] RP2350B", "QFN-80 Package", Supplier Part Number 1=2648-SC1510-A4CT-ND, Supplier 1=DigiKey
U3: "TXS0108EQPWRQ1", Supplier Part Number 1=296-42401-1-ND, Supplier 1=DigiKey
X1: library part "[Port] USB Type-C", Supplier Part Number 1=670-3104-1-ND, Supplier 1=DigiKey
Y1: library part "[XTAL] SMD 12MHz", "815-ABM8-272-T3", Supplier Part Number 1=535-ABM8-272-T3CT-ND, Supplier 1=DigiKey

## Via types
v1: diameter 0.7, hole 0.3, Top Layer to Bottom Layer, 80 vias

## Nets (pads, with @x,y where several pads share a name; then routed paths per layer and width w, separated by ;. In a path a pad name is that pad's centre, name@x,y a point inside that pad or via, vN(x,y) a via of type N, cw(c..) or ccw(c..) an arc to the next point about the centre after c; other vN are vias at no path point)
+1V1: C14.2 C20.2 C21.2 C25.2 L2.1 U2.10 U2.32 U2.51 U2.65 | length 50.8
  Top Layer w0.2: U2.10 28.05,28.2 v1(28.5,27.75) ; U2.32 32.85,23.759 33.25,24.159 v1(33.25,24.25) ; v1(34.75,31.75) 34.75,31.885 34.45,32.185 U2.65 34.45,34.95 35.5,36 35.5,37.25 v1(38,39.75) v1(39.5,39.75) ; v1(36,28.5) 36.135,28.5 36.435,28.2 U2.51
  Bottom Layer w0.2: C21.2 22.975,28.25 28,28.25 v1(28.5,27.75) 30.75,25.5 32,25.5 v1(33.25,24.25) ; v1(34.75,31.75) 34.75,29.75 v1(36,28.5) ; C25.2 35.179,19.321 33.25,21.25 v1(33.25,24.25) ; L2.1 v1(38,39.75) ; C14.2 v1(39.5,39.75) ; C20.2 40.5,28.75 40.25,28.5 v1(36,28.5) ; v1(33.25,24.25) 34.75,25.75 34.75,27.5 35.654,28.404 35.904,28.404 v1(36,28.5)
+3V3: C1.1 C11.2 C12.1 C13.2 C15.2 C16.2 C17.2 C18.2 C19.2 C22.2 C23.2 C24.2 C26.2 C27.2 H9.5 H11.2 R6.2 R7.2 R9.2 R11.2 R17.2 U1.8 U2.5 U2.15 U2.24 U2.29 U2.41 U2.50 U2.60 U2.64 U2.68 U2.69 U2.76 U3.2 U3.10 | length 118.4
  Top Layer w0.2: H9.5 9.81,20.81 15.744,26.744 v1(15.744,28.244) 15.744,29.256 13.006,31.994 v1(11.494,31.994) ; v1(24,31) 25.285,31 26.02,30.265 26.905,30.265 26.97,30.2 U2.5 ; U2.15 27.26,26.21 28.46,26.21 v1(28.5,26.25) ; v1(29,31.75) 29.005,31.755 29.505,31.755 30.05,32.3 U2.76 ; U1.8@29.45,41.405 29.675,41.63 C1.1 v1(31,43.25) ; U2.24@29.66,23.01 29.66,24.16 v1(29.75,24.25) ; U2.29 31.66,23.01 31.66,24.16 v1(31.75,24.25) ; U2.69 32.85,34.9 ; U2.68 33.25,34.5 32.85,34.9 ; U2.64 34.85,34.6 v1(36.5,36.25) ; v1(36,24.25) 36.04,24.21 37.24,24.21 U2.41 U2.41@37.26,24.21 ; v1(36,27.5) 36.135,27.5 36.435,27.8 U2.50 ; U2.60 37.26,31.79 40.46,31.79 v1(40.5,31.75) ; 32.5,35.25 v1(32.5,36.25) 32.5,35.25 ; 32.5,35.25 32.85,34.9
  Bottom Layer w0.2: R9.2 15.47,29.53 15.744,29.256 v1(15.744,28.244) ; R7.2 10.251,31.994 v1(11.494,31.994) ; U3.10 11.156,39.143 11.156,40.889 11.268,41 v1(16.25,41) ; U3.2 16.262,39.074 16.262,40.987 v1(16.25,41) ; C11.2 18.475,40.175 17.65,41 v1(16.25,41) ; C23.2 22.975,26.25 v1(28.5,26.25) ; C19.2 22.925,30.225 23.15,30.45 23.45,30.45 v1(24,31) ; v1(29,31.75) 29,36.275 29.8,37.075 29.8,37.1 30.025,37.325 C17.2 ; v1(29.75,24.25) 29.75,21.25 31.496,19.504 C27.2 ; v1(31.75,24.25) 31.75,21.75 33.655,19.845 C26.2 ; v1(32.5,36.25) C16.2 ; v1(36,24.25) 41.525,24.25 C24.2 ; v1(36,27.5) 40.25,27.5 40.5,27.25 C22.2 ; v1(36.5,36.25) C15.2 ; v1(40.5,31.75) 41.525,31.75 C18.2 ; C13.2 R6.2 C12.1 v1(44,39.75) ; R17.2 53.111,16.46 53,16.571 53,18.889 53.111,19 R11.2
  other v1: 53,17.75
+5V: C4.2 C5.2 C6.2 C7.2 C8.2 C9.2 C10.2 H1.1 H1.2 H2.1 H2.2 H3.1 H3.2 H11.1 U3.19 | length 20.4
  Bottom Layer w0.23: H1.1 C9.2 ; v1(14.25,42.75) v1(16.25,42.75) ; H1.2 C8.2 ; U3.19 16.262,44.926 16.262,42.763 v1(16.25,42.75) ; C10.2 18.475,43.825 17.4,42.75 v1(16.25,42.75) ; H2.1 C7.2 ; H2.2 C6.2 ; H3.1 C5.2 ; H3.2 C4.2
"Buzzer (5V)": H5.1 U3.12 | length 9
  Bottom Layer w0.2: H5.1 9.71,40.96 11.725,42.975 U3.12
"Buzzer EN": U2.16 U3.9 | length 23.7
  Top Layer w0.2: v1(12,36.75) 12,34.25 20.45,25.8 U2.16
  Bottom Layer w0.2: U3.9 11.725,37.16 12,36.885 v1(12,36.75)
Earth: L1.1 Mount1.1 Mount2.1 Mount3.1 Mount4.1 X1.MH | length 15.9
  Top Layer w0.5: L1.1 Mount1.1@60,63.5
  Power Layer w0.2: X1.MH@45.686,59.92 45.686,60.295 46.406,61.015 46.406,61.92 46.406,63.56 45.686,64.28 X1.MH@45.686,64.97 ; X1.MH@54.326,59.92 54.326,60.295 53.606,61.015 53.606,61.92 53.606,63.56 54.326,64.28 X1.MH@54.326,64.97
GND: C1.2 C2.1 C3.1 C4.1 C5.1 C6.1 C7.1 C8.1 C9.1 C10.1 C11.1 C12.2 C13.1 C14.1 C15.1 C16.1 C17.1 C18.1 C19.1 C20.1 C21.1 C22.1 C23.1 C24.1 C25.1 C26.1 C27.1 D1.2 D2.2 D3.2 D4.2 D5.2 H1.9 H1.10 H2.9 H2.10 H3.9 H3.10 H4.1 H5.2 H6.1 H7.3 H8.3 H9.6 H10.3 H11.4 L1.2 R4.2 R5.1 R10.2 S1.2 U1.4 U2.62 U2.Pad U3.11 X1.A1 X1.A12 X1.B1 X1.B12 Y1.2 Y1.4 | length 62.7
  Top Layer w0.2: D1.2 D2.2 D3.2 D4.2 D5.2 22.05,15.05 23.45,15.05 v1(23.5,15) ; U1.4 23,37.546 v1(23,36.5) ; v1(27,43.25) C1.2 ; C2.1 v1(30,16.9) 31.7,16.9 32.175,17.5 33.075,18.7 Y1.4 ; v1(35.25,14.15) C3.1 ; U2.62 35.65,33.65 37.5,35.5 38.75,35.5 v1(39.5,36.25) ; v1(47.25,57.5) 47.166,57.584 47.166,59.185 X1.A12 47.131,59.95 47.346,60.165 47.346,60.785 X1.B1 ; X1.B12 52.846,60.785 52.846,60.165 52.631,59.95 X1.A1 52.631,58.905 53.25,58.286 v1(53.25,57.5)
  Top Layer w0.5: v1(60,55.75) L1.2
  Bottom Layer w0.2: v1(9.738,45.012) 11.001,45.012 U3.11 ; C9.1 v1(16.75,65.675) ; C10.1 18.575,45.25 v1(20,45.25) ; C7.1 v1(28.75,65.675) ; C16.1 v1(32.5,39.75) ; C15.1 v1(36.5,39.75) ; C5.1 v1(40.75,65.675) ; v1(39.5,36.25) C14.1 C13.1 ; v1(42.75,23) 42.75,24.025 C24.1 ; C20.1 C22.1 S1.2@44.75,27.25 ; v1(44,36.25) C12.2 ; v1(46.8,20.875) R10.2@47.825,20.875 ; R4.2 v1(48.75,66) ; v1(52.25,53.25) R5.1
  other v1: 32.25,27 32.25,28 32.25,29
LED1: R16.2 U2.21 | length 17.1
  Top Layer w0.2: v1(14,20) 15.71,21.71 27.757,21.71 28.45,22.402 U2.21
  Bottom Layer w0.2: R16.2 v1(14,20)
LED2: R15.2 U2.22 | length 15.5
  Top Layer w0.2: v1(16,20) 17.39,21.39 27.89,21.39 28.85,22.35 U2.22
  Bottom Layer w0.2: R15.2 v1(16,20)
LED3: R14.2 U2.23 | length 14
  Top Layer w0.2: v1(18,20) 19.07,21.07 28.07,21.07 29.25,22.25 U2.23
  Bottom Layer w0.2: R14.2 v1(18,20)
LED4: R13.2 U2.25 | length 12.6
  Top Layer w0.2: v1(20,20) 20.75,20.75 28.27,20.75 30.04,22.52 30.04,22.99 U2.25
  Bottom Layer w0.2: R13.2 v1(20,20)
LED5: R12.2 U2.26 | length 11.1
  Top Layer w0.2: v1(22,20) 22.111,20 22.541,20.43 28.403,20.43 30.45,22.477 U2.26
  Bottom Layer w0.2: R12.2 v1(22,20)
"Left Motor Control 1": U2.12 U3.4 | length 20.6
  Top Layer w0.2: v1(15,36.75) 15,33 20.6,27.4 U2.12
  Bottom Layer w0.2: U3.4 14.988,39.049 14.988,36.762 v1(15,36.75)
"Left Motor Control 1 (5V)": H2.6 H3.5 H3.6 U3.17 | length 32.9
  Bottom Layer w0.23: U3.17 14.975,49.475 18.75,53.25 25.25,53.25 25.964,53.964 25.964,55.794 H2.6 H3.5 H3.6
"Left Motor Control 2": U2.11 U3.3 | length 19.9
  Top Layer w0.2: v1(16,36.75) 16,32.453 20.653,27.8 U2.11
  Bottom Layer w0.2: U3.3 15.625,37.26 16,36.885 v1(16,36.75)
"Left Motor Control 2 (5V)": H2.8 H3.7 H3.8 U3.18 | length 34.7
  Bottom Layer w0.23: U3.18 15.625,49.375 16.5,50.25 28.25,50.25 29,51 29,52.63 H2.8 H3.7 H3.8
"Motor 1 PWM": H1.3 U2.7 | length 40.9
  Top Layer w0.23: H1.3 13.92,58.25 16.5,58.25 18.748,56.002 18.748,32.406 21.754,29.4 U2.7
"Motor 2 PWM": H1.4 U2.6 | length 39.5
  Top Layer w0.23: H1.4 17.96,59.54 19.098,58.402 19.098,32.552 21.85,29.8 U2.6
"Motor 3 PWM": H2.3 U2.4 | length 48.8
  Top Layer w0.23: H2.3 25.92,58.25 29.5,58.25 31.4,56.35 31.4,47.636 29.815,46.051 22.315,46.051 19.449,43.185 19.449,34.315 21.065,32.699 24.06,32.699 26.159,30.6 U2.4
"Motor 4 PWM": H2.4 U2.3 | length 46.1
  Top Layer w0.23: H2.4 28.71,59.54 31.75,56.5 31.75,47.491 29.96,45.701 22.46,45.701 19.799,43.04 19.799,34.46 21.21,33.049 24.205,33.049 26.254,31 U2.3
"Motor 5 PWM": H3.3 U2.2 | length 45.1
  Top Layer w0.23: U2.2 26.35,31.4 24.35,33.4 21.355,33.4 20.15,34.605 20.15,42.895 22.605,45.35 30.105,45.35 33.4,48.645 33.4,57.15 35.585,59.335 36.425,59.335 H3.3
"Motor 6 PWM": H3.4 U2.1 | length 46.6
  Top Layer w0.23: U2.1 27.245,31.805 26.44,31.805 24.496,33.75 21.5,33.75 20.5,34.75 20.5,42.75 22.75,45 30.25,45 33.75,48.5 33.75,57 35,58.25 37.88,58.25 H3.4
NetC3_2: C3.2 R3.2 Y1.3 | length 3.1
  Top Layer w0.2: Y1.3 35.225,16.95 C3.2 R3.2
NetD1_1: D1.1 R16.1 | length 2.5
  Top Layer w0.2: v1(14,16) D1.1@14,16.9
  Bottom Layer w0.2: v1(14,16) R16.1
NetD2_1: D2.1 R15.1 | length 2.5
  Top Layer w0.2: v1(16,16) D2.1@16,16.9
  Bottom Layer w0.2: v1(16,16) R15.1
NetD3_1: D3.1 R14.1 | length 2.5
  Top Layer w0.2: v1(18,16) D3.1@18,16.9
  Bottom Layer w0.2: v1(18,16) R14.1
NetD4_1: D4.1 R13.1 | length 2.5
  Top Layer w0.2: v1(20,16) D4.1@20,16.9
  Bottom Layer w0.2: v1(20,16) R13.1
NetD5_1: D5.1 R12.1 | length 2.5
  Top Layer w0.2: v1(22,16) D5.1@22,16.9
  Bottom Layer w0.2: v1(22,16) R12.1
NetR4_1: R4.1 X1.B5 | length 3
  Top Layer w0.23: v1(48.75,62.25) 49.381,61.619 X1.B5
  Bottom Layer w0.23: v1(48.75,62.25) R4.1
NetR5_2: R5.2 X1.A5 | length 4.3
  Top Layer w0.23: X1.A5 50.651,59.2 50.651,58.599 51.155,58.095 51.655,58.095 v1(52.25,57.5)
  Bottom Layer w0.23: R5.2 v1(52.25,57.5)
NetR10_1: R10.1 S2.2 | length 10.4
  Bottom Layer w0.2: S2.2@44.75,23.75 51.25,23.75 49.675,22.175 R10.1
"NRF CE": H12.1 U2.42 | length 25.6
  Top Layer w0.2: U2.42 38.4,24.6 42.5,20.5 42.5,14.35 H12.1
"NRF CS": H12.2 U2.40 | length 25
  Top Layer w0.2: U2.40 36.06,22.99 36.06,22.393 36.261,22.191 40.059,22.191 42,20.25 42,13.25 48.581,6.669 48.581,5.729 H12.2
"NRF INT": H12.5 U2.37 | length 22.1
  Top Layer w0.2: U2.37 34.85,22.245 35.864,21.231 39.269,21.231 40.5,20 40.5,6.463 41.19,5.773 H12.5
"NRF MISO": H12.6 U2.36 | length 20.5
  Top Layer w0.2: U2.36 34.45,22.192 35.731,20.911 37.839,20.911 38.65,20.1 H12.6
"NRF MOSI": H12.3 U2.39 | length 24.1
  Top Layer w0.2: U2.39 35.65,22.35 36.129,21.871 39.879,21.871 41.5,20.25 41.5,11.75 46.27,6.98 H12.3
"NRF SCK": H12.4 U2.38 | length 23
  Top Layer w0.2: U2.38 35.25,22.298 35.996,21.551 39.449,21.551 41,20 41,10 43.73,7.27 H12.4
QSPI_SCLK: U1.6 U2.71 | length 7.3
  Top Layer w0.2: U1.6 31.135,38.865 31.43,38.57 31.43,35.415 32.05,34.795 U2.71
QSPI_SD0: U1.5 U2.72 | length 5.7
  Top Layer w0.2: U1.5 30.243,37.402 30.999,37.402 31.11,37.291 31.11,35.282 31.65,34.742 U2.72
QSPI_SD1: U1.2 U2.74 | length 17
  Top Layer w0.2: U1.2 21.635,40.135 21.18,39.68 21.18,36.367 22.117,35.43 29.637,35.43 30.85,34.217 U2.74
QSPI_SD2: U1.3 U2.73 | length 15.5
  Top Layer w0.2: U1.3 21.865,38.865 21.5,38.5 21.5,36.5 22.25,35.75 29.77,35.75 31.25,34.27 U2.73
QSPI_SD3: U1.7 U2.70 | length 8.9
  Top Layer w0.2: U1.7 31.365,40.135 31.75,39.75 31.75,35.547 32.45,34.847 U2.70
QSPI_SS: R8.2 U1.1 U2.75 | length 39
  Top Layer w0.2: U1.1 21.405,41.405 20.86,40.86 20.86,36.235 21.985,35.11 29.39,35.11 30.45,34.05 U2.75 30.46,32.99 30.46,31.777 v1(30.494,31.744)
  Bottom Layer w0.2: v1(30.494,31.744) 33,34.25 45.75,34.25 47.325,32.675 R8.2
Relay_EN: H8.1 U2.48 | length 23
  Top Layer w0.2: U2.48 38.5,27 40.72,29.22 53.72,29.22 54.54,30.04 H8.1
Relay_FB: H8.2 U2.47 | length 23.3
  Top Layer w0.2: U2.47 38.6,26.6 40.9,28.9 57.6,28.9 H8.2
"Right Motor Control 1": U2.14 U3.6 | length 22.6
  Top Layer w0.2: v1(13,36.75) 13,34.047 20.447,26.6 U2.14
  Bottom Layer w0.2: v1(13,36.75) 13.675,37.425 U3.6
"Right Motor Control 1 (5V)": H1.5 H1.6 H2.5 U3.15 | length 27.2
  Bottom Layer w0.23: U3.15 13.675,46.575 10.4,49.85 10.4,56.15 11.25,57 H1.5 H1.6 H2.5
"Right Motor Control 2": U2.13 U3.5 | length 21.6
  Top Layer w0.2: v1(14,36.75) 14,33.5 20.5,27 U2.13
  Bottom Layer w0.2: v1(14,36.75) 14,36.885 14.325,37.21 U3.5
"Right Motor Control 2 (5V)": H1.7 H1.8 H2.7 U3.16 | length 24.1
  Bottom Layer w0.23: U3.16 14.325,46.675 11,50 11,53.75 11.585,54.335 12.505,54.335 H1.7 H1.8 H2.7
RP2350-USB-5V-VIN: H11.3 X1.A4 X1.A9 X1.B4 X1.B9 | length 132.8
  Top Layer w0.23: X1.A9 48.631,59.965 48.861,60.195 48.861,60.8 X1.B4 48.881,61.499 48.761,61.619 48.381,61.619 v1(47.75,62.25) 47.75,63.85 47.9,64 51.107,64 51.381,63.726 X1.B9 51.361,60.8 51.361,60.195 51.131,59.965 X1.A4
  Bottom Layer w0.23: H11.3 16.23,6.98 17.75,8.5 58.25,8.5 62,12.25 62,52.5 56.5,58 56.5,66 55.5,67 48.5,67 47.75,66.25 v1(47.75,62.25)
RP2350_D_N: R1.1 X1.A7 X1.B7 | length 15.6
  Top Layer w0.23: R1.1 ccw(c49.25,56.496) 49.821,56.496 49.821,57.179 ccw(c49.5,57.179) v1(49.5,57.5) ccw(c49.5,57.631) 49.631,57.631 X1.A7 ; X1.B7 cw(c50.381,60.891) 50.31,60.891 50.31,61.81 cw(c50.75,61.81) v1(50.75,62.25)
  Bottom Layer w0.23: v1(49.5,57.5) ccw(c49.5,57.821) 49.821,57.821 49.821,59.679 cw(c50.5,59.679) 50.5,60.357 51.357,60.357 ccw(c51.357,61) 52,61 52,62.75 ccw(c51.25,62.75) 51.25,63.5 ccw(c51.25,62.75) 50.5,62.75 50.5,62.5 ccw(c50.75,62.5) v1(50.75,62.25)
RP2350_D_P: R2.1 X1.A6 X1.B6 | length 16.8
  Top Layer w0.23: v1(49.75,62.25) cw(c49.75,62.048) 49.952,62.048 49.952,60.891 cw(c49.881,60.891) X1.B6 ; X1.A6 50.131,57.869 ccw(c50.5,57.869) v1(50.5,57.5) ccw(c50.5,57.179) 50.179,57.179 50.179,56.496 ccw(c50.75,56.496) R2.1
  Bottom Layer w0.23: v1(49.75,62.25) ccw(c49.75,62.643) 50.143,62.643 50.143,62.75 cw(c51.25,62.75) 51.25,63.857 cw(c51.25,62.75) 52.357,62.75 52.357,61 cw(c51.357,61) 51.357,60 50.5,60 ccw(c50.5,59.679) 50.179,59.679 50.179,57.821 ccw(c50.5,57.821) v1(50.5,57.5)
RP2350_DX_N: R1.2 U2.66 | length 39.8
  Top Layer w0.23: U2.66 cw(c34.05,33.021) 34.029,33.021 34.029,35.779 cw(c34.5,35.779) v1(34.5,36.25) ; v1(49.25,53.25) ccw(c49.25,53.821) 49.821,53.821 49.821,54.025 ccw(c49.271,54.025) 49.271,54.575 R1.2
  Bottom Layer w0.23: v1(34.5,36.25) cw(c34.5,36.571) 34.179,36.571 34.179,48.429 cw(c35,48.429) 35,49.25 42.255,49.25 ccw(c42.255,50.852) 43.857,50.852 ; 43.851,50.853 ccw(c42.107,51) 43.857,51 43.857,53.607 cw(c45,53.607) 45,54.75 49.096,54.75 cw(c49.096,54.025) 49.821,54.025 49.821,53.821 cw(c49.25,53.821) v1(49.25,53.25)
RP2350_DX_P: R2.2 U2.67 | length 40.7
  Top Layer w0.23: v1(33.5,36.25) cw(c33.5,36.079) 33.671,36.079 33.671,33.021 cw(c33.65,33.021) U2.67 ; v1(50.75,53.25) cw(c50.75,53.821) 50.179,53.821 50.179,54.025 cw(c50.729,54.025) 50.729,54.575 R2.2
  Bottom Layer w0.23: v1(33.5,36.25) ccw(c33.5,36.571) 33.821,36.571 33.821,48.429 cw(c35,48.429) 35,49.607 42.107,49.607 ccw(c42.107,51) 43.5,51 43.5,53.607 cw(c45,53.607) 45,55.107 49.096,55.107 cw(c49.096,54.025) 50.179,54.025 50.179,53.821 ccw(c50.75,53.821) v1(50.75,53.25)
RUN: S2.1 U2.35 | length 19.7
  Top Layer w0.2: U2.35 34.05,21.585 34.25,21.385 v1(34.25,21.25)
  Bottom Layer w0.2: v1(34.25,21.25) 42.75,21.25 44.75,19.25 S2.1@51.25,19.25
SCL0: H10.2 R17.1 U2.46 | length 33.4
  Top Layer w0.2: U2.46 41.55,26.2 42.18,25.57 52.68,25.57 57.5,20.75 59.5,20.75 60.75,19.5 60.75,18.21 H10.2
  Bottom Layer w0.2: R17.1 H10.2
SCL1: H7.2 R7.1 U2.9 | length 29.9
  Top Layer w0.2: H7.2 H7.2@5.535,32.035 ; U2.9 28.715,28.6 28.865,28.75 v1(29,28.75)
  Bottom Layer w0.2: H7.2 R7.1 ; R7.1@8.977,32.07 R7.1 ; v1(29,28.75) 29.5,29.25 29.5,30.25 29,30.75 28.25,30.75 27,29.5 20.25,29.5 18.75,31 9.25,31 8.825,31.425 R7.1
SDA0: H10.1 R11.1 U2.45 | length 27.9
  Top Layer w0.2: U2.45 41.45,25.8 42,25.25 52.5,25.25 58.75,19 H10.1
  Bottom Layer w0.2: R11.1 H10.1
SDA1: H7.1 R9.1 U2.8 | length 26.9
  Top Layer w0.2: H7.1 H7.1@5.515,29.515 ; U2.8 28.25,29 28.404,29.154 28.404,29.654 v1(28.5,29.75)
  Bottom Layer w0.2: H7.1 5.504,29.526 8.712,29.526 8.937,29.301 R9.1@8.937,29.276 ; R9.1 8.825,30.175 9.25,30.6 18.5,30.6 20.1,29 27.75,29 v1(28.5,29.75)
"Servo 1 PWM": H9.1 U2.20 | length 29.6
  Top Layer w0.2: H9.1 6.9,10.65 10.32,14.07 10.32,17.82 16.7,24.2 U2.20
"Servo 2 PWM": H9.2 U2.19 | length 27.5
  Top Layer w0.2: H9.2 6.94,13.19 10,16.25 10,17.953 16.647,24.6 U2.19
"Servo 3 PWM": H9.3 U2.18 | length 25.6
  Top Layer w0.2: H9.3 7.325,15.73 16.595,25 U2.18
"Servo 4 PWM": H9.4 U2.17 | length 24.7
  Top Layer w0.2: H9.4 9.412,18.27 16.542,25.4 U2.17
U\S\B\_\B\O\O\T\: R8.1 S1.1 | length 10.2
  Bottom Layer w0.2: S1.1@44.75,31.75 46,30.5 50,30.5 51.25,31.75 48.9,31.75 48.675,31.975 R8.1
"UART0 RX": H4.2 U2.56 | length 40.2
  Top Layer w0.2: U2.56 37.26,30.21 38.21,30.21 38.5,30.5 52.639,30.5 53,30.861 53,48.5 54.223,49.723 H4.2
"UART0 TX": H4.3 U2.55 | length 37.9
  Top Layer w0.2: U2.55 38.253,29.8 38.633,30.18 52.93,30.18 53.5,30.75 53.5,46 54.683,47.183 H4.3
"UART1 RX": H6.2 U2.52 | length 29
  Top Layer w0.2: U2.52 39.1,28.6 40.36,29.86 53.387,29.86 54,30.473 54,35.75 56.924,38.674 H6.2
"UART1 TX": H6.3 U2.49 | length 27.8
  Top Layer w0.2: U2.49 38.353,27.4 40.493,29.54 53.52,29.54 54.5,30.52 54.5,34.75 55.884,36.134 H6.3
VREG_AVDD: R6.1 U2.61 | length 9.2
  Top Layer w0.2: U2.61 36.05,33.55 37.5,35 41.25,35 v1(42.5,36.25)
  Bottom Layer w0.2: v1(42.5,36.25) R6.1
VREG_LX: L2.2 U2.63 | length 5.6
  Top Layer w0.2: U2.63 35.25,33.75 37.654,36.154 37.904,36.154 v1(38,36.25)
  Bottom Layer w0.2: v1(38,36.25) L2.2
XIN: C2.2 U2.30 Y1.1 | length 11.5
  Top Layer w0.2: C2.2 31.325,19.675 Y1.1 32.05,19.55 32.05,20.15 32.05,20.25 ccw(c31.85,20.25) 31.85,20.45 30.25,20.45 cw(c30.25,20.65) 30.25,20.85 31.93,20.85 ccw(c31.93,21.05) 31.93,21.25 31.128,21.25 cw(c31.128,21.45) 31.128,21.65 31.85,21.65 ccw(c31.85,21.85) 32.05,21.85 U2.30
XOUT: R3.1 U2.31 | length 5.7
  Top Layer w0.2: U2.31 32.45,21.05 33,20.5 35,20.5 35.25,20.25 R3.1
pads on no net: U2.27 U2.28 U2.33 U2.34 U2.43 U2.44 U2.53 U2.54 U2.57 U2.58 U2.59 U2.77 U2.78 U2.79 U2.80 U3.1 U3.7 U3.8 U3.13 U3.14 U3.20 X1.A2 X1.A3 X1.A8 X1.A10 X1.A11 X1.B2 X1.B3 X1.B8 X1.B10 X1.B11

## Polygon pours and split planes (outlines as drawn)
+3V3 on Power Layer "+3V3 Power Poly" (solid, remove dead copper, shelved, pour order 2): 23.8,0 56,0 56,50 15,50 15,8 12,8 12,4 20,4 20,8 23.8,8
+5V on Power Layer "+5V Power Poly" (solid, remove dead copper, shelved, pour order 1): 20,8 23.8,8 23.8,0 8.5,0 8.5,63 56,63 56,50 15,50 15,8 12,8 12,4 20,4
Earth on Power Layer "Earth Power Poly" (solid, remove dead copper, shelved, pour order 0): 0,0 8.5,0 8.5,63 56,63 56,0 64.5,0 64.5,68 0,68
GND on Ground Layer "GND Poly" (solid, remove dead copper, shelved, pour order 3): 0,68 64.5,68 64.5,0 0,0
GND on Top Layer "Top GND Poly" (hatched 45Degree grid 0.508 track 0.203, remove dead copper, shelved, pour order 5): 0,68 64.5,68 64.5,0 0,0
GND on Bottom Layer "Bottom GND Poly" (hatched 45Degree grid 0.508 track 0.203, remove dead copper, shelved, pour order 6): 0,68 64.5,68 64.5,0 0,0

## Keep-outs
Keep-Out Layer:
  the board outline again, w0.2

## Silkscreen, mask and mechanical layers (free items; w line width, h text height)
Top Overlay:
  drawing of 13 lines, arcs and shapes, not listed
  text "BUZZER" at 5.5,46.63 h1.5 r90
  text "SENSORS" at 55.81,44.725 h1.5 r90
  text "M1 M2" at 10.626,44.62 h1.5
  text "M3 M4" at 22.501,44.62 h1.5
  text "M5 M6" at 34.501,44.62 h1.5
  text "BATT / MON" at 56.21,35.525 h1.5 r90
  text "V0" at 16.75,29.75 h1.5
  text "ESP32" at 10.15,28.571 h1.5 r90
  text "RELAY" at 55.81,24.001 h1.5 r90
  text "RP2350 Mini / Board" at 9.775,22.471 h1.5
  text "RPI" at 55.81,14.711 h1.5 r90
  text "SERVO" at 10.19,13.966 h1.5 r90
  text "POWER" at 14.041,8.69 h1.5
  text "nRF24L01" at 39.502,8.69 h1.5
Bottom Overlay:
  region: 28.925,5.659 28.568,5.659 28.568,6.614 29.522,6.614 29.522,6.612 29.523,6.612 29.523,5.659 28.926,5.659
  region: 24.75,11.119 24.75,11.386 25.703,11.386 25.703,11.385 25.705,11.385 25.705,10.432 24.75,10.432 24.75,11.118
  region: 34.295,10.726 34.295,11.385 34.297,11.385 34.297,11.386 35.25,11.386 35.25,10.432 34.295,10.432 34.295,10.725
  region: 31.432,6.538 31.432,5.659 30.477,5.659 30.477,6.612 30.478,6.612 30.478,6.614 31.432,6.614 31.432,6.539
  region: 27.631,12.341 28.568,12.341 28.568,11.386 31.432,11.386 31.432,12.341 32.386,12.341 32.386,10.432 31.432,10.432 31.432,8.523 32.386,8.523 32.386,10.432 34.295,10.432 34.295,9.478 34.294,9.478 34.294,9.477 33.341,9.477 33.341,8.523 34.294,8.523 34.294,8.521 34.295,8.521 34.295,7.568 35.25,7.568 35.25,5.659 34.295,5.659 34.295,6.614 33.342,6.614 33.342,6.615 33.341,6.615 33.341,7.568 32.386,7.568 32.386,6.615 32.385,6.615 32.385,6.614 31.432,6.614 31.432,7.568 28.568,7.568 28.568,6.614 27.615,6.614 27.615,6.615 27.614,6.615 27.614,7.568 26.659,7.568 26.659,6.615 26.658,6.615 26.658,6.614 25.705,6.614 25.705,5.659 24.75,5.659 24.75,7.568 25.705,7.568 25.705,8.521 25.706,8.521 25.706,8.523 26.659,8.523 26.659,9.477 25.706,9.477 25.706,9.478 25.705,9.478 25.705,10.432 27.614,10.432 27.614,8.523 28.568,8.523 28.568,10.432 27.614,10.432 27.614,12.341 27.629,12.341
  lines w0.2: 13.555,51.92 14.245,51.92 ; 13.555,54.46 14.245,54.46 ; 13.555,57 14.245,57 ; 13.555,62.08 14.245,62.08 ; 16.095,51.92 17.72,51.92 ; 16.095,54.46 16.55,54.46 ; 16.095,57 16.55,57 ; 16.095,62.08 17.72,62.08 ; 22.08,51.92 23.705,51.92 ; 22.08,62.08 23.705,62.08 ; 23.25,54.46 23.705,54.46 ; 23.25,57 23.705,57 ; 25.555,51.92 26.245,51.92 ; 25.555,62.08 26.245,62.08 ; 28.095,51.92 29.72,51.92 ; 28.095,54.46 28.55,54.46 ; 28.095,57 28.55,57 ; 28.095,62.08 29.72,62.08 ; 34.08,51.92 35.705,51.92 ; 34.08,62.08 35.705,62.08 ; 35.25,54.46 35.705,54.46 ; 35.25,57 35.705,57 ; 37.555,51.92 38.245,51.92 ; 37.555,54.46 38.245,54.46 ; 37.555,57 38.245,57 ; 37.555,62.08 38.245,62.08
  lines w0.254: 38.75,46.508 39.258,46 ; 39.258,47.008 38.75,46.5 46,46.5 46,53.75 46.508,53.242 ; 45.5,53.242 46.008,53.75 ; 55.05,2.75 56.75,2.75 56.242,3.258 ; 56.242,2.25 56.75,2.758
  text "+5V" at 21.499,61.48 h1.2
  text "+5V" at 33.499,61.48 h1.2
  text "PWM" at 21.499,58.94 h1.2
  text "PWM" at 33.499,58.94 h1.2
  text "SIG 1" at 22.399,56.4 h1.2
  text "SIG 1" at 34.399,56.4 h1.2
  text "SIG 2" at 22.599,53.86 h1.2
  text "SIG 2" at 34.599,53.86 h1.2
  text "GND" at 63.749,51.663 h1.2
  text "GND" at 21.499,51.32 h1.2
  text "GND" at 33.499,51.32 h1.2
  text "RX" at 62.549,49.123 h1.2
  text "Board" at 45.25,49.05 h1.2
  text "Dim" at 45.25,47.25 h1.2
  text "UART0" at 56,46.924 h1.2 r270
  text "68mm" at 46.75,46.826 h1.2 r270
  text "TX" at 62.549,46.583 h1.2
  text "BUZZER" at 4.9,45.3 h1.2 r270
  text "64.5mm" at 45.674,44.8 h1.2
  text "GND" at 3.95,42.9 h1.2
  text "GND" at 63.749,40.614 h1.2
  text "BUZ" at 3.95,40.36 h1.2
  text "RX" at 62.549,38.074 h1.2
  text "I2C1" at 7.399,36.3 h1.2
  text "UART1" at 56,36.075 h1.2 r270
  text "TX" at 62.549,35.534 h1.2
  text "GND" at 3.95,34.01 h1.2
  text "SCL" at 3.95,31.47 h1.2
  text "EN" at 62.549,29.44 h1.2
  text "SDA" at 3.95,28.93 h1.2
  text "FB" at 62.549,26.9 h1.2
  text "RELAY" at 56,24.701 h1.2 r270
  text "GND" at 63.749,24.36 h1.2
  text "GND" at 3.95,22.75 h1.2
  text "3V3" at 3.95,20.21 h1.2
  text "SDA" at 63.749,18.4 h1.2
  text "S4" at 3.95,17.67 h1.2
  text "SCL" at 63.749,15.86 h1.2
  text "S3" at 3.95,15.13 h1.2
  text "SERVO" at 7.5,14.201 h1.2 r270
  text "GND" at 63.749,13.32 h1.2
  text "S2" at 3.95,12.59 h1.2
  text "I2C0" at 61.859,11.425 h1.2
  text "S1" at 3.95,10.05 h1.2
  text "GND" at 13.09,7.3 h1.2 r270
  text "USB" at 15.63,7.3 h1.2 r270
  text "+3V3" at 18.17,7.3 h1.2 r270
  text "+5V" at 20.71,7.3 h1.2 r270
  text "MISO" at 38.05,7.3 h1.2 r270
  text "INT" at 40.59,7.3 h1.2 r270
  text "SCK" at 43.13,7.3 h1.2 r270
  text "MOSI" at 45.67,7.3 h1.2 r270
  text "CS" at 48.21,7.3 h1.2 r270
  text "CE" at 50.75,7.3 h1.2 r270
  text "POWER" at 20.299,2.5 h1.2
  text "nRF" at 46.599,2.5 h1.2
  text "M3" at 54.5,2.15 h1.2
  text "Designed by / Russell MacGregor" at 38.422,1.377 h1
Poly Planning:
  lines w0.2: 23.81,0 23.81,8 20,8 20,4 12,4 12,8 15,8 15,50 56,50 ; 0,0 0,68 64.5,68 64.5,0 56,0 56,63 8.5,63 8.5,0 0,0